# Altium PCB PLL_PCB.PcbDoc (part 1 of 3)
Units mil, origin at the board's own origin, x right, y up, seen from the top; angles counter-clockwise.
Board outline 8251 x 7030 mil, 4 copper layers (Top Layer, Mid-Layer 1, Mid-Layer 2, Bottom Layer); 235 components, 120 nets, 656 pads, 49 vias.
Unrouted connection lines stored in the file: 215.
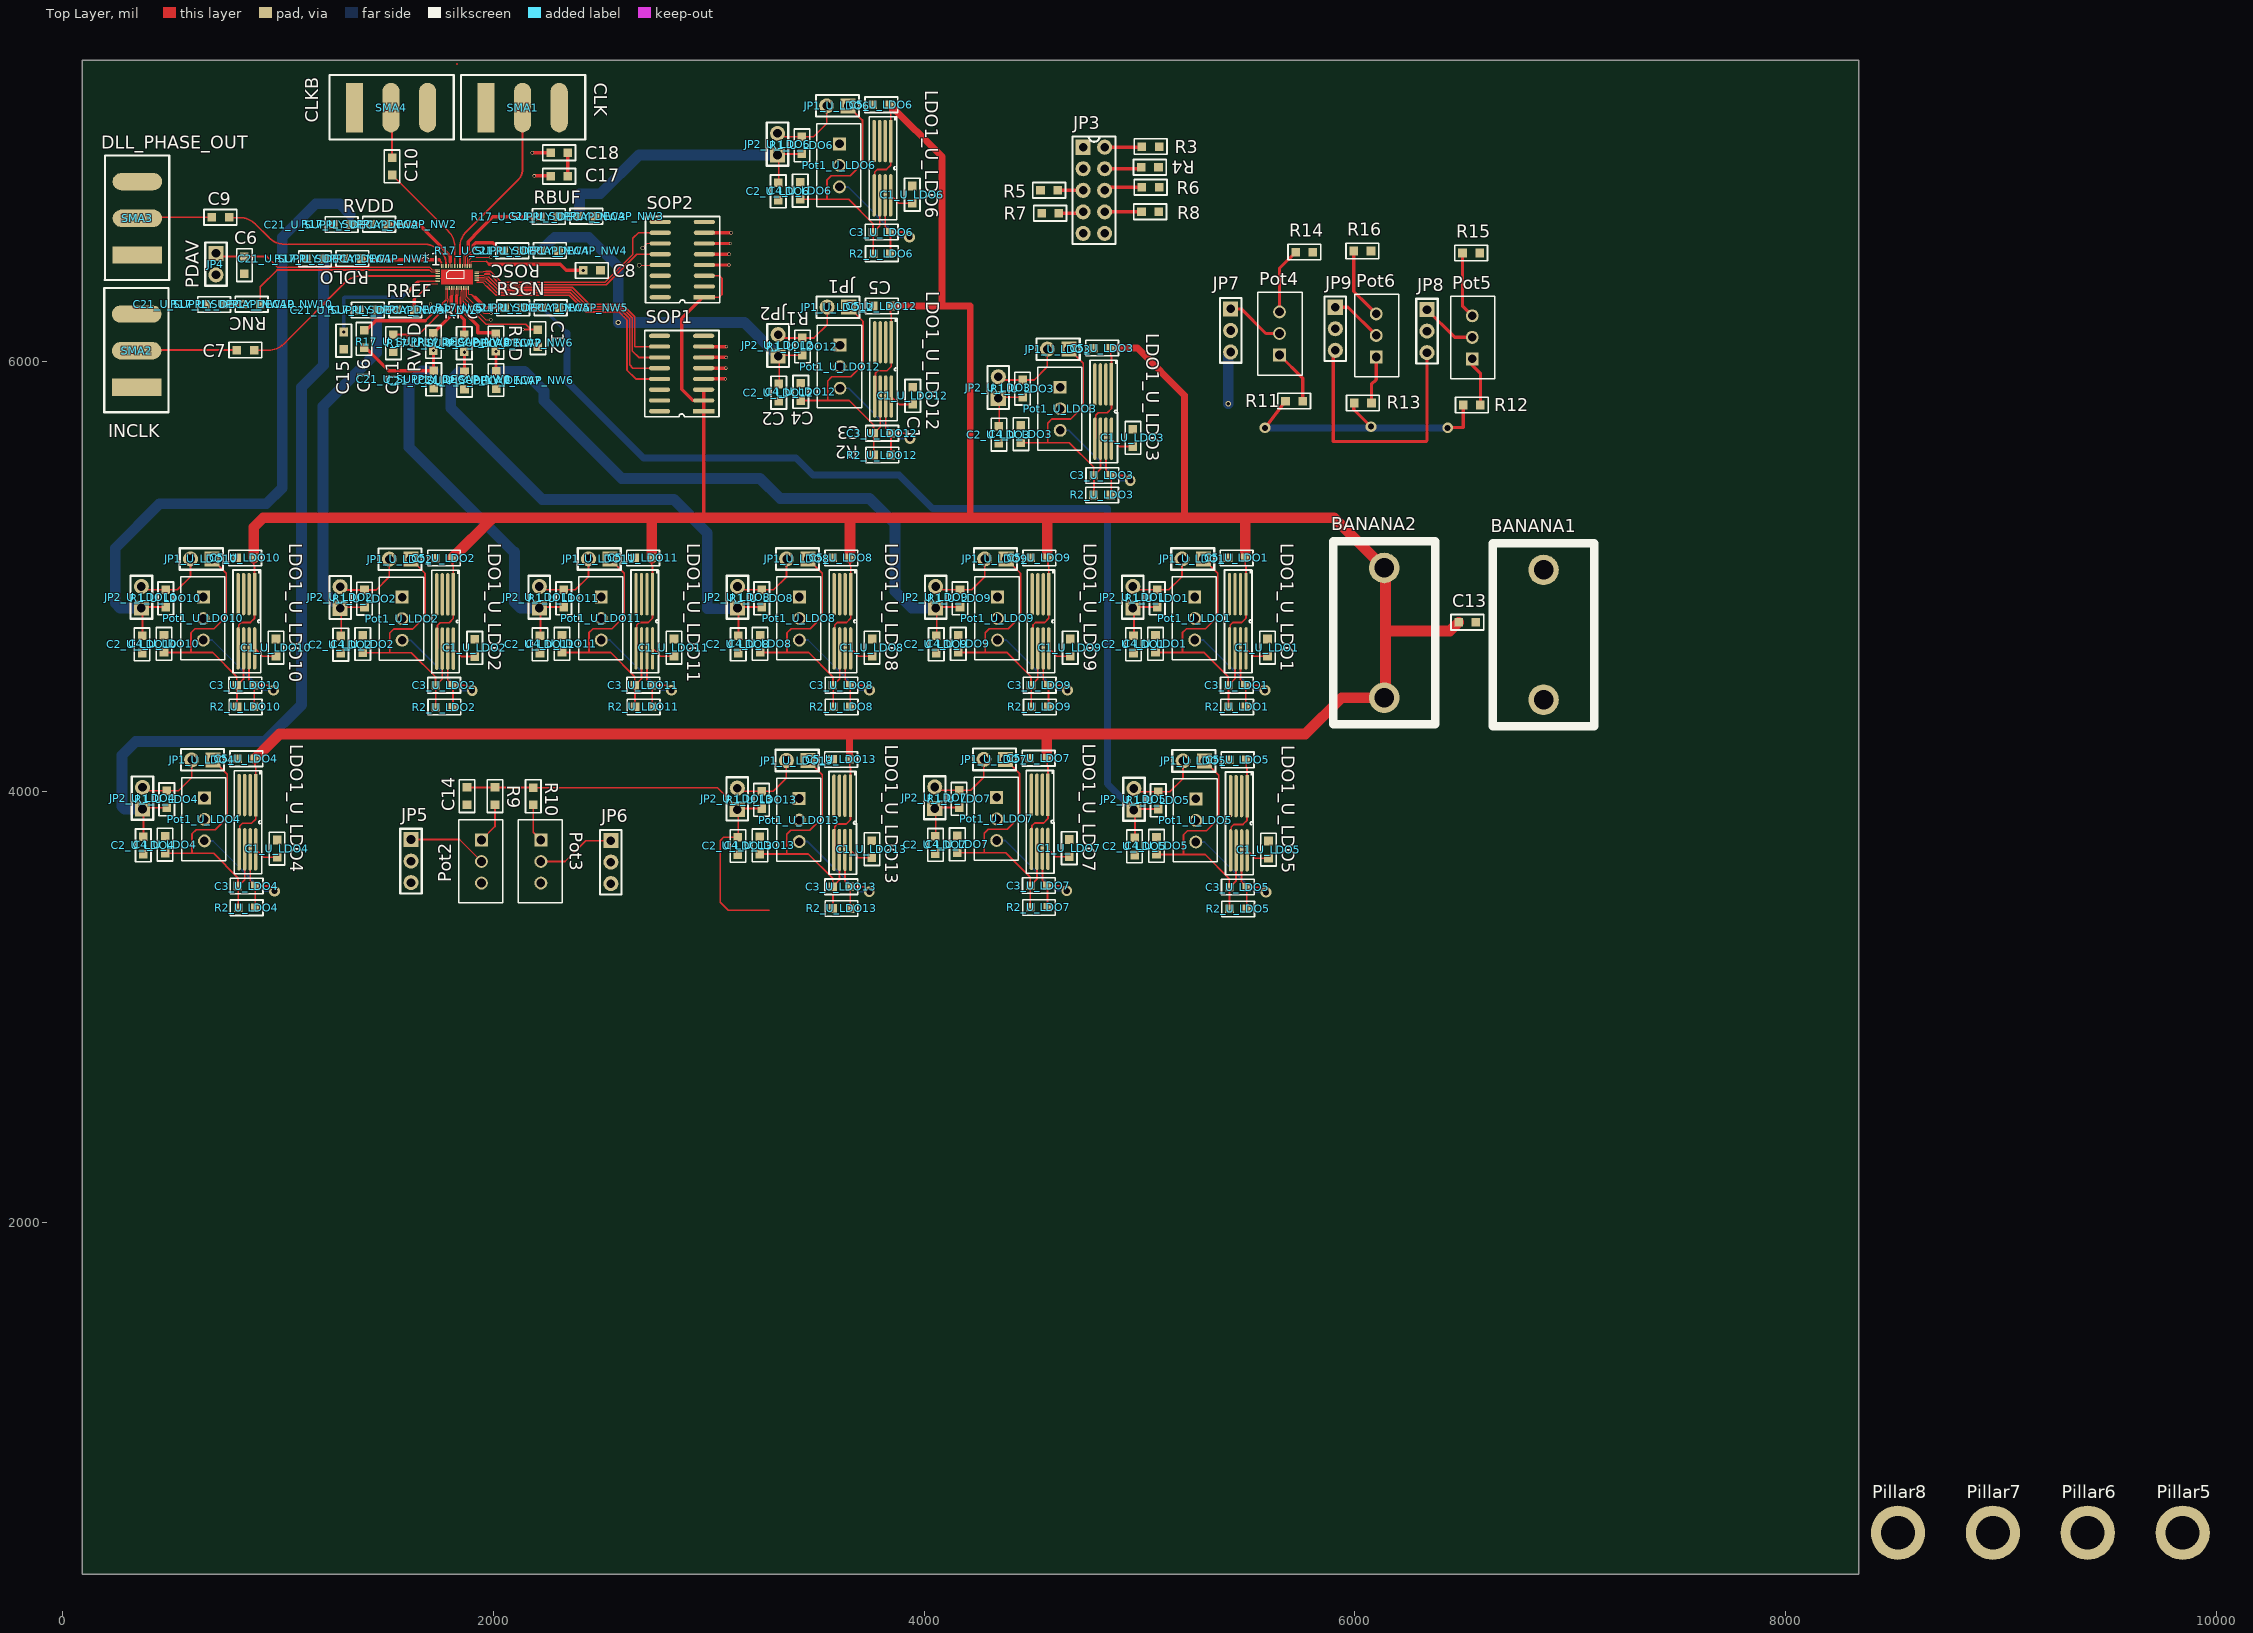
[diagram p0: Top Layer view]
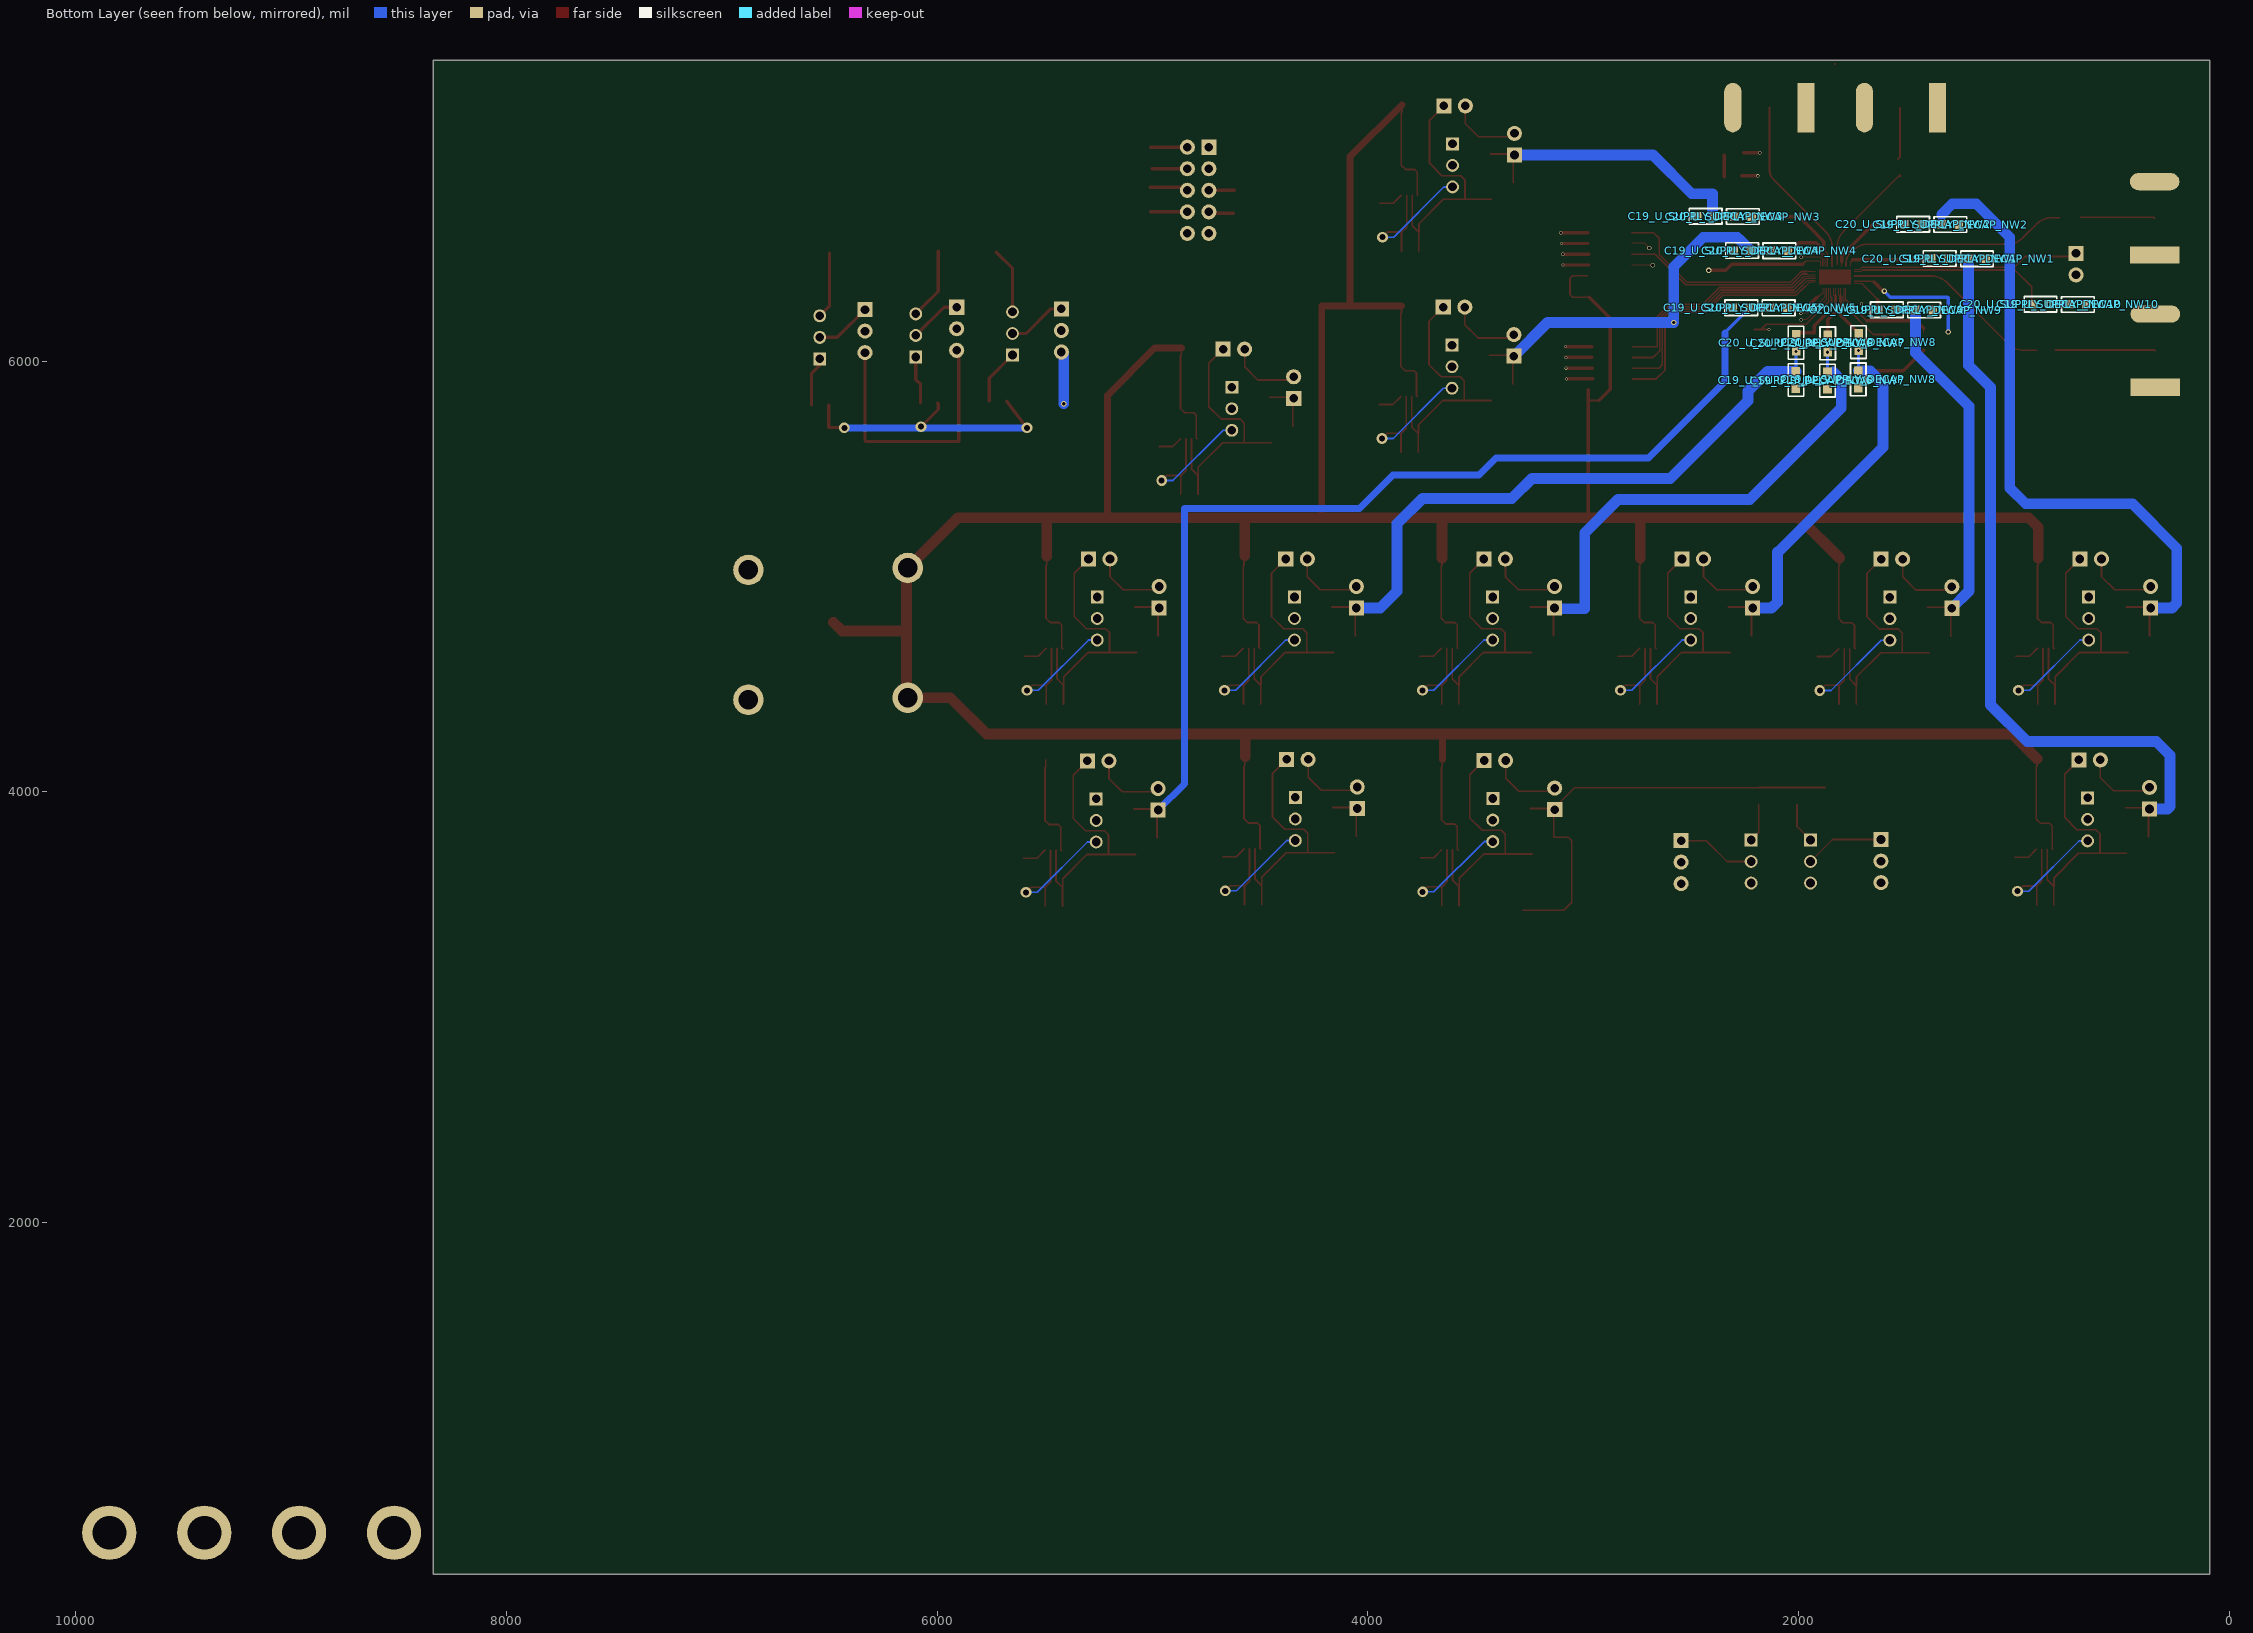
[diagram p1: Bottom Layer view, seen from below]
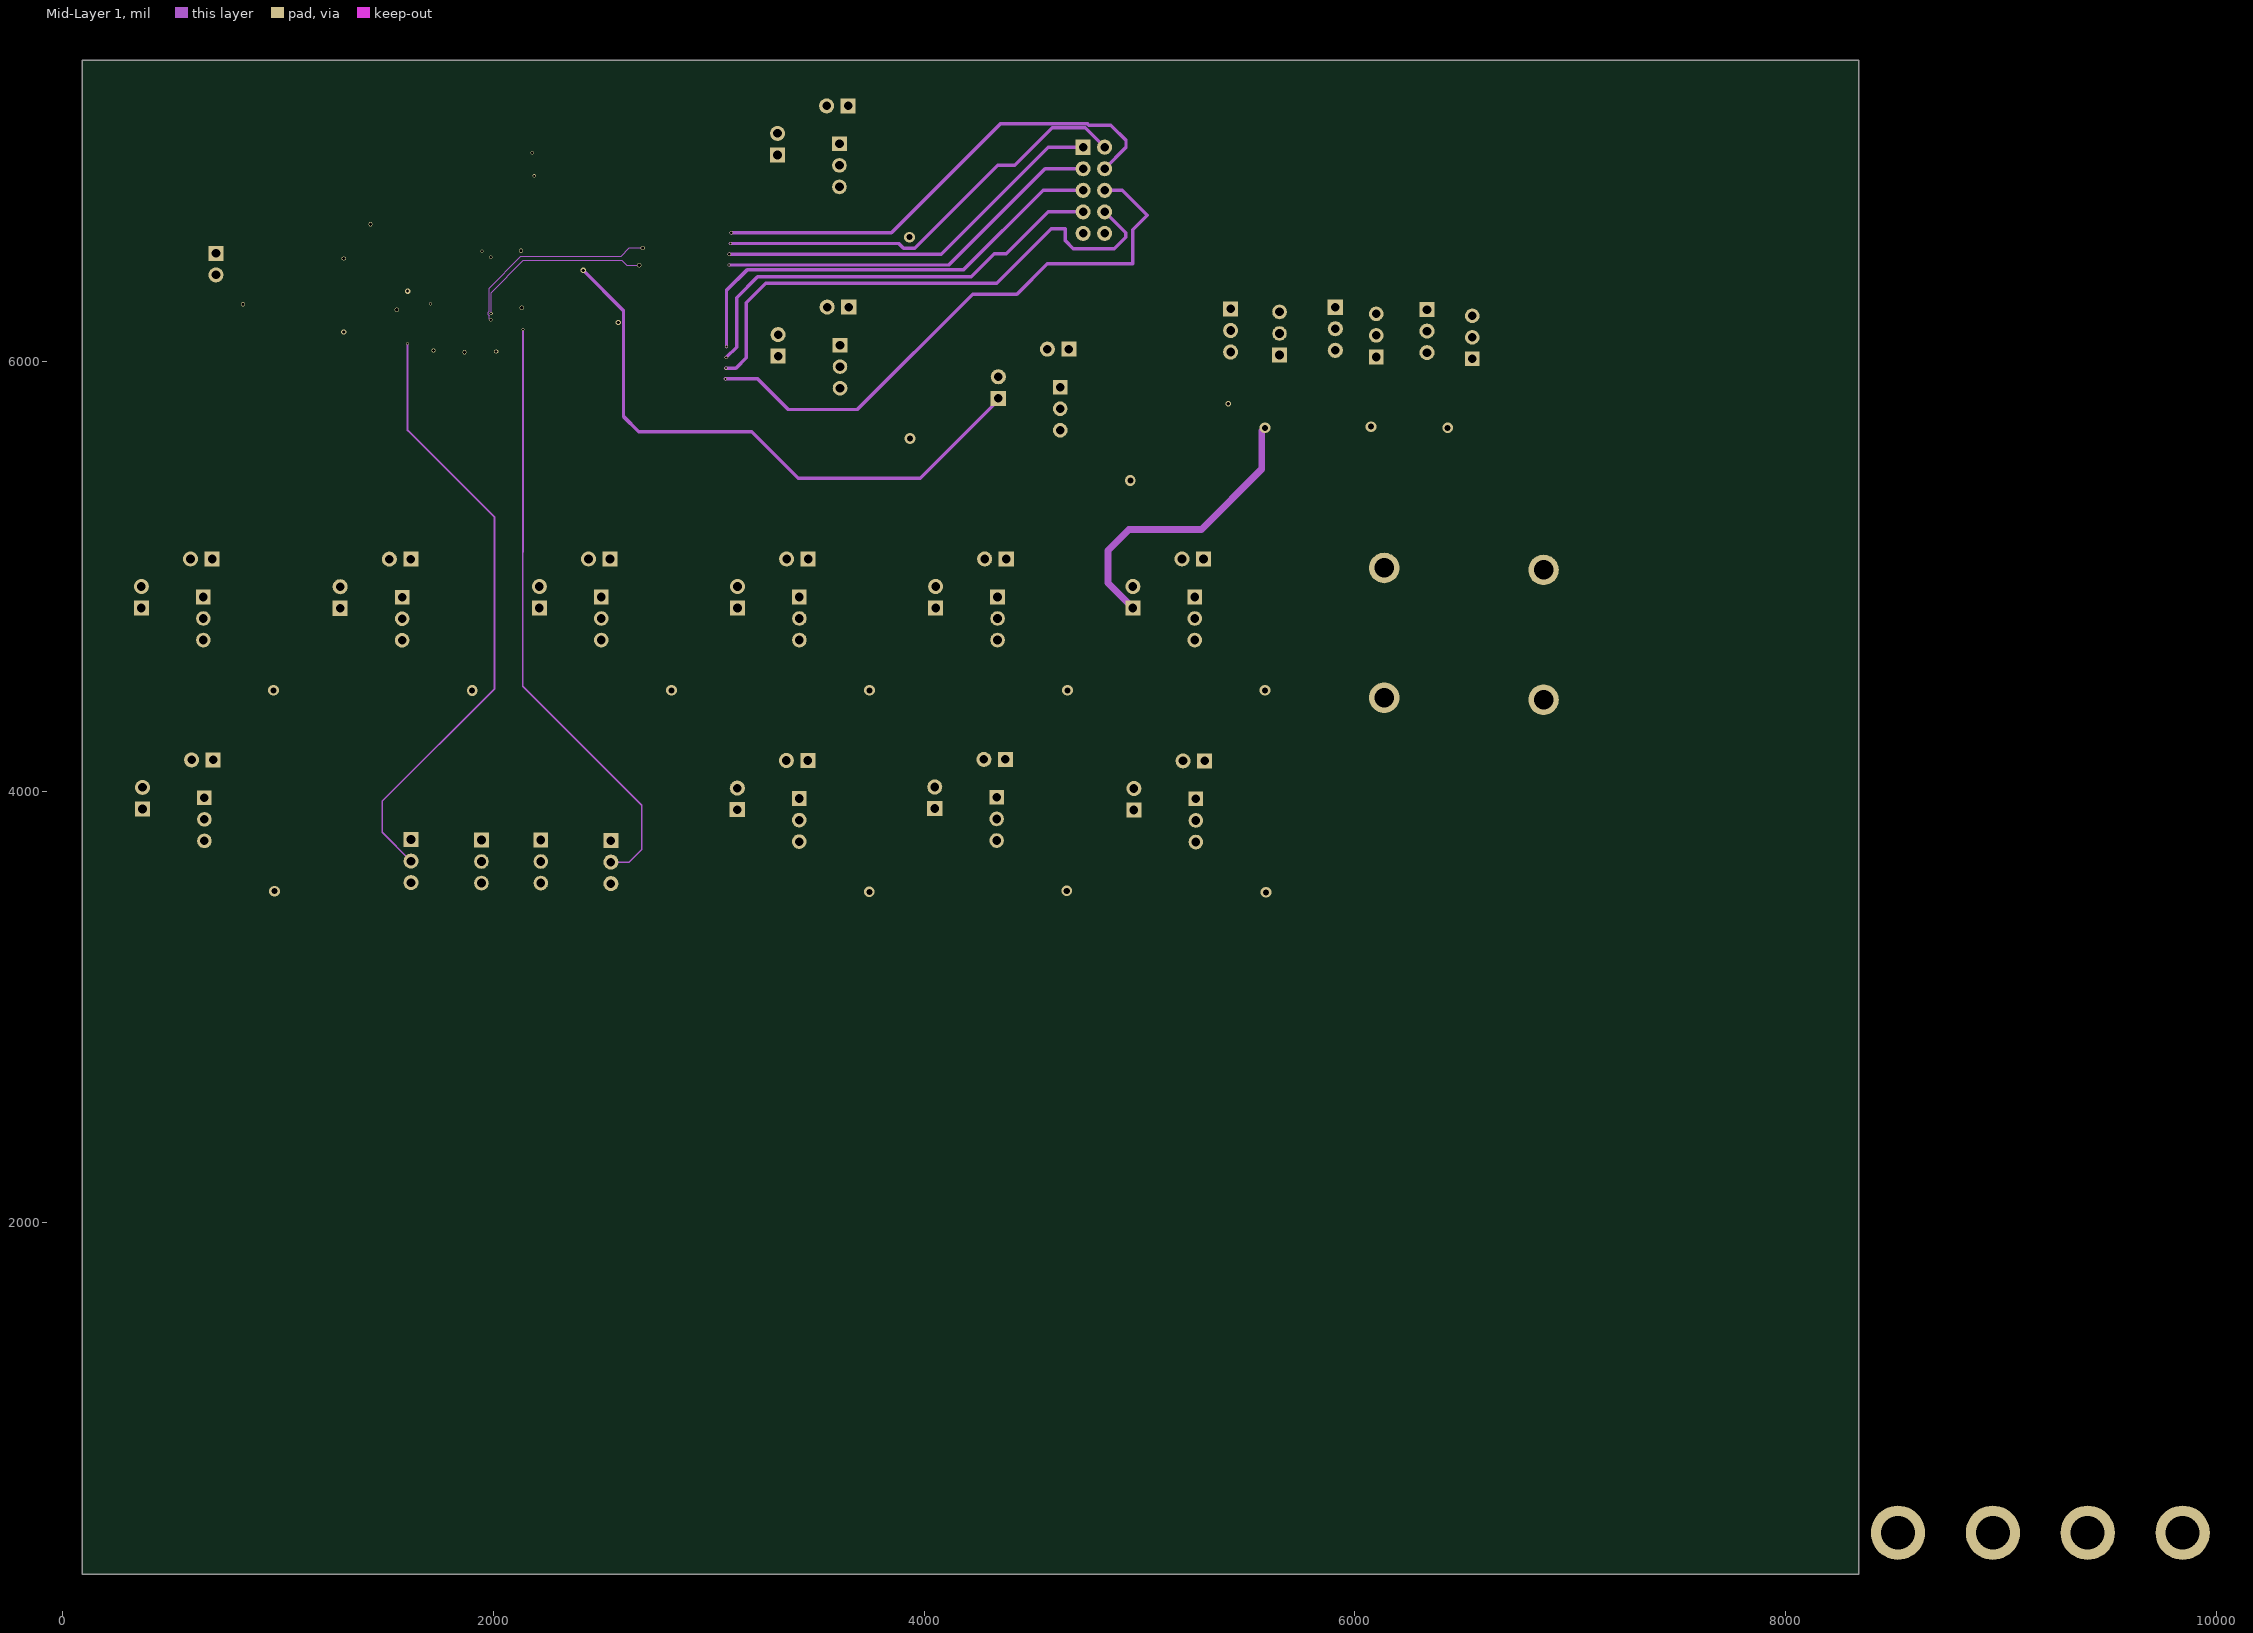
[diagram p2: Mid-Layer 1]
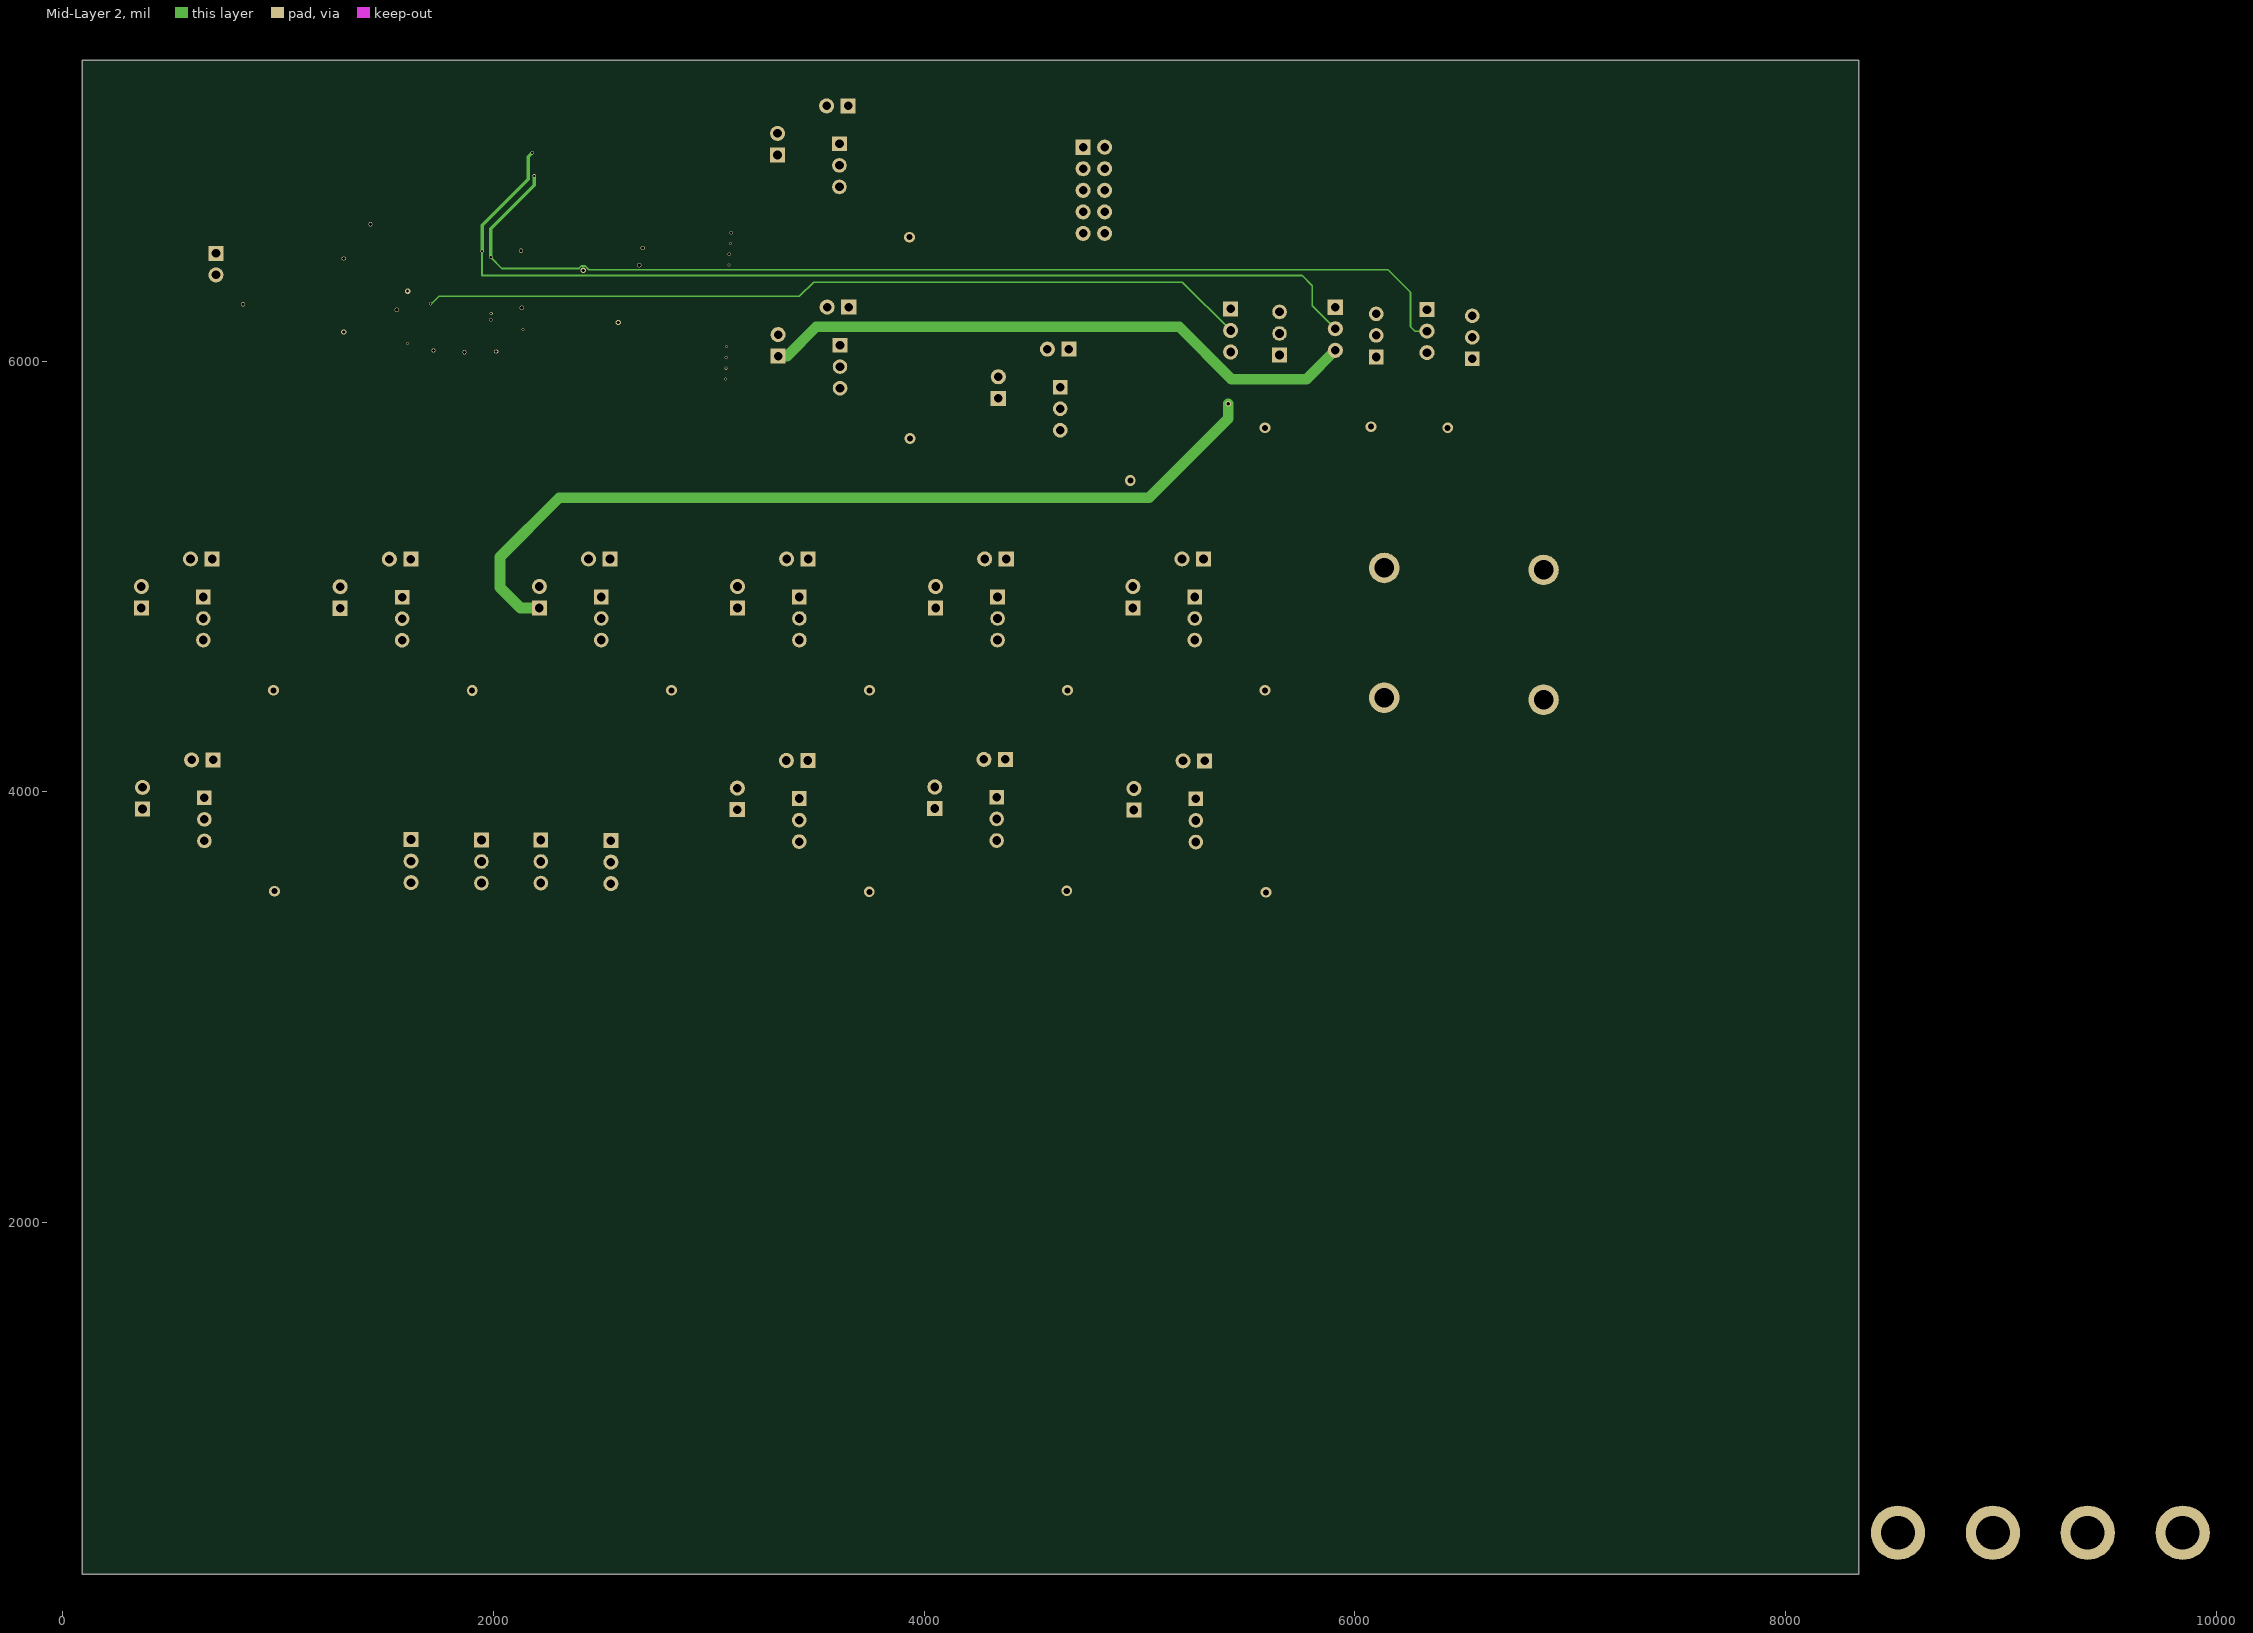
[diagram p3: Mid-Layer 2]

## Layer stack, top to bottom
Top Solder: solder mask 0.4, Solder Resist, Dk 3.5
Top Layer: signal copper 1.4
Dielectric 1: dielectric 12.6, FR-4, Dk 4.8
Mid-Layer 1: signal copper 1.4
Dielectric2: dielectric 12.6, FR-4, Dk 4.8
Mid-Layer 2: signal copper 1.4
Dielectric3: dielectric 12.6, FR-4, Dk 4.8
Bottom Layer: signal copper 1.4
Bottom Solder: solder mask 0.4, Solder Resist, Dk 3.5

## Board outline
90,368 8341,368 8341,7398 90,7398

## Design rules (kind name [scope] priority, off if disabled: settings)
Clearance "Stitching GND" [IsStitchingVia and InNet('GND') vs (IsVia and (Not IsStitchingVia)) Or IsPad] p1: gap=40
Clearance Clearance_CPWG_single [(InNet('INCLK') OR InNet('PLL_CLK_OUT') OR InNet('PLL_CLK_OUTB')) vs InPolygon] p2: gap=6
Clearance [All] p3: gap=4
DiffPairsRouting [InNet('TXP') OR InNet('TXN')] p1: maxlimit=10 minlimit=10 mostfreqgap=10 toplayer_minwidth=15 toplayer_maxwidth=15 toplayer_prefwidth=15 midlayer1_minwidth=15 midlayer1_maxwidth=15 midlayer1_prefwidth=15 midlayer2_minwidth=15 midlayer2_maxwidth=15 midlayer2_prefwidth=15 bottomlayer_minwidth=15 bottomlayer_maxwidth=15 bottomlayer_prefwidth=15 maxuncoupledlength=500
HoleSize [All] p1: absolutevalues=TRUE maxlimit=250 minlimit=10 maxpercent=80.000 minpercent=20.000
MatchedLengths MatchedLengths_1 [InNet('RXP') OR InNet('RXN')] p1: tolerance=10 checknetsindiffpair=FALSE checkdiffpairvsdiffpair=TRUE checkothers=TRUE
MatchedLengths [InNet('TXP') OR InNet('TXN')] p2: tolerance=1 checknetsindiffpair=FALSE checkdiffpairvsdiffpair=TRUE checkothers=TRUE
PolygonConnect PolygonConnect_GND [All] p1: connectstyle=Direct reliefconductorwidth=10 reliefentries=4 polygonreliefangle="90 Angle" airgapwidth=10
PolygonConnect [All] p2: connectstyle=Relief reliefconductorwidth=10 reliefentries=4 polygonreliefangle="90 Angle" airgapwidth=10
RoomDefinition MainSchematic [InComponentClass('MainSchematic')] p1: confinementstyle=ConfineIn formatcopy=TRUE lockcomponents=FALSE outline 8386,424 10109,424 10109,796 8386,796
RoomDefinition U_LDO11 [InComponentClass('U_LDO11')] p2: confinementstyle=ConfineIn formatcopy=TRUE lockcomponents=FALSE outline 2987,5279 2067,5279 2067,4348 2987,4348
RoomDefinition U_SUPPLY_DECAP_NW7 [InComponentClass('U_SUPPLY_DECAP_NW7')] p3: confinementstyle=ConfineIn formatcopy=TRUE lockcomponents=FALSE outline 1927,5820 1927,6170 1796,6170 1796,5820
RoomDefinition U_SUPPLY_DECAP_NW10 [InComponentClass('U_SUPPLY_DECAP_NW10')] p4: confinementstyle=ConfineIn formatcopy=TRUE lockcomponents=FALSE outline 613,6202 963,6202 963,6333 613,6333
RoomDefinition U_SUPPLY_DECAP_NW9 [InComponentClass('U_SUPPLY_DECAP_NW9')] p5: confinementstyle=ConfineIn formatcopy=TRUE lockcomponents=FALSE outline 1327,6176 1677,6176 1677,6307 1327,6307
RoomDefinition U_SUPPLY_DECAP_NW8 [InComponentClass('U_SUPPLY_DECAP_NW8')] p6: confinementstyle=ConfineIn formatcopy=TRUE lockcomponents=FALSE outline 1784,5826 1784,6176 1653,6176 1653,5826
RoomDefinition U_SUPPLY_DECAP_NW6 [InComponentClass('U_SUPPLY_DECAP_NW6')] p7: confinementstyle=ConfineIn formatcopy=TRUE lockcomponents=FALSE outline 2074,5823 2074,6173 1943,6173 1943,5823
RoomDefinition U_SUPPLY_DECAP_NW5 [InComponentClass('U_SUPPLY_DECAP_NW5')] p8: confinementstyle=ConfineIn formatcopy=TRUE lockcomponents=FALSE outline 2355,6311 2005,6311 2005,6180 2355,6180
RoomDefinition U_SUPPLY_DECAP_NW4 [InComponentClass('U_SUPPLY_DECAP_NW4')] p9: confinementstyle=ConfineIn formatcopy=TRUE lockcomponents=FALSE outline 2352,6576 2002,6576 2002,6445 2352,6445
RoomDefinition U_SUPPLY_DECAP_NW3 [InComponentClass('U_SUPPLY_DECAP_NW3')] p10: confinementstyle=ConfineIn formatcopy=TRUE lockcomponents=FALSE outline 2521,6735 2141,6735 2141,6604 2521,6604
RoomDefinition U_SUPPLY_DECAP_NW2 [InComponentClass('U_SUPPLY_DECAP_NW2')] p11: confinementstyle=ConfineIn formatcopy=TRUE lockcomponents=FALSE outline 1205,6573 1555,6573 1555,6704 1205,6704
RoomDefinition U_SUPPLY_DECAP_NW1 [InComponentClass('U_SUPPLY_DECAP_NW1')] p12: confinementstyle=ConfineIn formatcopy=TRUE lockcomponents=FALSE outline 1081,6414 1431,6414 1431,6545 1081,6545
RoomDefinition U_LDO13 [InComponentClass('U_LDO13')] p13: confinementstyle=ConfineIn formatcopy=TRUE lockcomponents=FALSE outline 3906,4343 2986,4343 2986,3412 3906,3412
RoomDefinition U_LDO12 [InComponentClass('U_LDO12')] p14: confinementstyle=ConfineIn formatcopy=TRUE lockcomponents=FALSE outline 4095.5,6448.5 3175.5,6448.5 3175.5,5517.5 4095.5,5517.5
RoomDefinition U_LDO10 [InComponentClass('U_LDO10')] p15: confinementstyle=ConfineIn formatcopy=TRUE lockcomponents=FALSE outline 1139,5279 219,5279 219,4348 1139,4348
RoomDefinition U_LDO9 [InComponentClass('U_LDO9')] p16: confinementstyle=ConfineIn formatcopy=TRUE lockcomponents=FALSE outline 4827,5279 3907,5279 3907,4348 4827,4348
RoomDefinition U_LDO8 [InComponentClass('U_LDO8')] p17: confinementstyle=ConfineIn formatcopy=TRUE lockcomponents=FALSE outline 3907,5279 2987,5279 2987,4348 3907,4348
RoomDefinition U_LDO7 [InComponentClass('U_LDO7')] p18: confinementstyle=ConfineIn formatcopy=TRUE lockcomponents=FALSE outline 4823,4348 3903,4348 3903,3417 4823,3417
RoomDefinition U_LDO6 [InComponentClass('U_LDO6')] p19: confinementstyle=ConfineIn formatcopy=TRUE lockcomponents=FALSE outline 4093,7383 3173,7383 3173,6452 4093,6452
RoomDefinition U_LDO5 [InComponentClass('U_LDO5')] p20: confinementstyle=ConfineIn formatcopy=TRUE lockcomponents=FALSE outline 5748,4341 4828,4341 4828,3410 5748,3410
RoomDefinition U_LDO4 [InComponentClass('U_LDO4')] p21: confinementstyle=ConfineIn formatcopy=TRUE lockcomponents=FALSE outline 1144,4346 224,4346 224,3415 1144,3415
RoomDefinition U_LDO3 [InComponentClass('U_LDO3')] p22: confinementstyle=ConfineIn formatcopy=TRUE lockcomponents=FALSE outline 5118,6253 4198,6253 4198,5322 5118,5322
RoomDefinition U_LDO2 [InComponentClass('U_LDO2')] p23: confinementstyle=ConfineIn formatcopy=TRUE lockcomponents=FALSE outline 2062,5278 1142,5278 1142,4347 2062,4347
RoomDefinition U_LDO1 [InComponentClass('U_LDO1')] p24: confinementstyle=ConfineIn formatcopy=TRUE lockcomponents=FALSE outline 5743,5279 4823,5279 4823,4348 5743,4348
RoutingVias [All] p1: holewidth=28 width=50 viastyle="Through Hole" minholewidth=10 minwidth=15 maxholewidth=250 maxwidth=250
SolderMaskExpansion "Schematic Solder Mask Expansion_2" [InComponent('C6')] p1: expansion=5
SolderMaskExpansion "Schematic Solder Mask Expansion_13" [InComponent('Pot3')] p2: expansion=5
SolderMaskExpansion "Schematic Solder Mask Expansion_10" [InComponent('R10')] p3: expansion=5
SolderMaskExpansion "Schematic Solder Mask Expansion_7" [InComponent('SMA1')] p4: expansion=5
SolderMaskExpansion "Schematic Solder Mask Expansion_4" [InComponent('SMA2')] p5: expansion=5
SolderMaskExpansion "Schematic Solder Mask Expansion_1" [InComponent('SMA3')] p6: expansion=5
SolderMaskExpansion "Schematic Solder Mask Expansion" [InComponent('SMA4')] p7: expansion=5
SolderMaskExpansion "Schematic Solder Mask Expansion_307" [InComponent('C1_U_LDO5')] p8: expansion=5
SolderMaskExpansion "Schematic Solder Mask Expansion_306" [InComponent('C1_U_LDO4')] p9: expansion=5
SolderMaskExpansion "Schematic Solder Mask Expansion_305" [InComponent('C1_U_LDO1')] p10: expansion=5
SolderMaskExpansion "Schematic Solder Mask Expansion_304" [InComponent('C1_U_LDO3')] p11: expansion=5
SolderMaskExpansion "Schematic Solder Mask Expansion_303" [InComponent('C1_U_LDO2')] p12: expansion=5
SolderMaskExpansion "Schematic Solder Mask Expansion_302" [InComponent('BANANA2')] p13: expansion=5
SolderMaskExpansion "Schematic Solder Mask Expansion_301" [InComponent('BANANA1')] p14: expansion=5
SolderMaskExpansion "Schematic Solder Mask Expansion_300" [InComponent('C20_U_SUPPLY_DECAP_NW9')] p15: expansion=5
SolderMaskExpansion "Schematic Solder Mask Expansion_299" [InComponent('C1_U_LDO6')] p16: expansion=5
SolderMaskExpansion "Schematic Solder Mask Expansion_298" [InComponent('C1_U_LDO7')] p17: expansion=5
SolderMaskExpansion "Schematic Solder Mask Expansion_297" [InComponent('C1_U_LDO8')] p18: expansion=5
SolderMaskExpansion "Schematic Solder Mask Expansion_296" [InComponent('C1_U_LDO9')] p19: expansion=5
SolderMaskExpansion "Schematic Solder Mask Expansion_295" [InComponent('C1_U_LDO10')] p20: expansion=5
SolderMaskExpansion "Schematic Solder Mask Expansion_294" [InComponent('C1_U_LDO11')] p21: expansion=5
SolderMaskExpansion "Schematic Solder Mask Expansion_293" [InComponent('C4_U_LDO5')] p22: expansion=5
SolderMaskExpansion "Schematic Solder Mask Expansion_292" [InComponent('C1_U_LDO12')] p23: expansion=5
SolderMaskExpansion "Schematic Solder Mask Expansion_291" [InComponent('C1_U_LDO13')] p24: expansion=5
SolderMaskExpansion "Schematic Solder Mask Expansion_290" [InComponent('C2_U_LDO1')] p25: expansion=5
SolderMaskExpansion "Schematic Solder Mask Expansion_289" [InComponent('C2_U_LDO2')] p26: expansion=5
SolderMaskExpansion "Schematic Solder Mask Expansion_288" [InComponent('C2_U_LDO3')] p27: expansion=5
SolderMaskExpansion "Schematic Solder Mask Expansion_287" [InComponent('C2_U_LDO4')] p28: expansion=5
SolderMaskExpansion "Schematic Solder Mask Expansion_286" [InComponent('C2_U_LDO5')] p29: expansion=5
SolderMaskExpansion "Schematic Solder Mask Expansion_285" [InComponent('C2_U_LDO6')] p30: expansion=5
SolderMaskExpansion "Schematic Solder Mask Expansion_284" [InComponent('C2_U_LDO7')] p31: expansion=5
SolderMaskExpansion "Schematic Solder Mask Expansion_283" [InComponent('C2_U_LDO8')] p32: expansion=5
SolderMaskExpansion "Schematic Solder Mask Expansion_282" [InComponent('C2_U_LDO9')] p33: expansion=5
SolderMaskExpansion "Schematic Solder Mask Expansion_281" [InComponent('C2_U_LDO10')] p34: expansion=5
SolderMaskExpansion "Schematic Solder Mask Expansion_280" [InComponent('C2_U_LDO11')] p35: expansion=5
SolderMaskExpansion "Schematic Solder Mask Expansion_279" [InComponent('C2_U_LDO12')] p36: expansion=5
SolderMaskExpansion "Schematic Solder Mask Expansion_278" [InComponent('C2_U_LDO13')] p37: expansion=5
SolderMaskExpansion "Schematic Solder Mask Expansion_277" [InComponent('C3_U_LDO1')] p38: expansion=5
SolderMaskExpansion "Schematic Solder Mask Expansion_276" [InComponent('C3_U_LDO2')] p39: expansion=5
SolderMaskExpansion "Schematic Solder Mask Expansion_275" [InComponent('C3_U_LDO3')] p40: expansion=5
SolderMaskExpansion "Schematic Solder Mask Expansion_274" [InComponent('C3_U_LDO4')] p41: expansion=5
SolderMaskExpansion "Schematic Solder Mask Expansion_273" [InComponent('C3_U_LDO5')] p42: expansion=5
SolderMaskExpansion "Schematic Solder Mask Expansion_272" [InComponent('C3_U_LDO6')] p43: expansion=5
SolderMaskExpansion "Schematic Solder Mask Expansion_271" [InComponent('C3_U_LDO7')] p44: expansion=5
SolderMaskExpansion "Schematic Solder Mask Expansion_270" [InComponent('C3_U_LDO8')] p45: expansion=5
SolderMaskExpansion "Schematic Solder Mask Expansion_269" [InComponent('C3_U_LDO9')] p46: expansion=5
SolderMaskExpansion "Schematic Solder Mask Expansion_268" [InComponent('C3_U_LDO10')] p47: expansion=5
SolderMaskExpansion "Schematic Solder Mask Expansion_267" [InComponent('C3_U_LDO11')] p48: expansion=5
SolderMaskExpansion "Schematic Solder Mask Expansion_266" [InComponent('C3_U_LDO12')] p49: expansion=5
SolderMaskExpansion "Schematic Solder Mask Expansion_265" [InComponent('C3_U_LDO13')] p50: expansion=5
SolderMaskExpansion "Schematic Solder Mask Expansion_264" [InComponent('C4_U_LDO1')] p51: expansion=5
SolderMaskExpansion "Schematic Solder Mask Expansion_263" [InComponent('C4_U_LDO2')] p52: expansion=5
SolderMaskExpansion "Schematic Solder Mask Expansion_262" [InComponent('C4_U_LDO3')] p53: expansion=5
SolderMaskExpansion "Schematic Solder Mask Expansion_261" [InComponent('C4_U_LDO4')] p54: expansion=5
SolderMaskExpansion "Schematic Solder Mask Expansion_260" [InComponent('C4_U_LDO6')] p55: expansion=5
SolderMaskExpansion "Schematic Solder Mask Expansion_259" [InComponent('C4_U_LDO7')] p56: expansion=5
SolderMaskExpansion "Schematic Solder Mask Expansion_258" [InComponent('C4_U_LDO8')] p57: expansion=5
SolderMaskExpansion "Schematic Solder Mask Expansion_257" [InComponent('C4_U_LDO9')] p58: expansion=5
SolderMaskExpansion "Schematic Solder Mask Expansion_256" [InComponent('C4_U_LDO10')] p59: expansion=5
SolderMaskExpansion "Schematic Solder Mask Expansion_255" [InComponent('C4_U_LDO11')] p60: expansion=5
SolderMaskExpansion "Schematic Solder Mask Expansion_254" [InComponent('C4_U_LDO12')] p61: expansion=5
SolderMaskExpansion "Schematic Solder Mask Expansion_253" [InComponent('C4_U_LDO13')] p62: expansion=5
SolderMaskExpansion "Schematic Solder Mask Expansion_252" [InComponent('C5_U_LDO1')] p63: expansion=5
SolderMaskExpansion "Schematic Solder Mask Expansion_251" [InComponent('C5_U_LDO2')] p64: expansion=5
SolderMaskExpansion "Schematic Solder Mask Expansion_250" [InComponent('C5_U_LDO3')] p65: expansion=5
SolderMaskExpansion "Schematic Solder Mask Expansion_249" [InComponent('C5_U_LDO4')] p66: expansion=5
SolderMaskExpansion "Schematic Solder Mask Expansion_248" [InComponent('C5_U_LDO5')] p67: expansion=5
SolderMaskExpansion "Schematic Solder Mask Expansion_247" [InComponent('C5_U_LDO6')] p68: expansion=5
SolderMaskExpansion "Schematic Solder Mask Expansion_246" [InComponent('C5_U_LDO7')] p69: expansion=5
SolderMaskExpansion "Schematic Solder Mask Expansion_245" [InComponent('C5_U_LDO8')] p70: expansion=5
SolderMaskExpansion "Schematic Solder Mask Expansion_244" [InComponent('C5_U_LDO9')] p71: expansion=5
SolderMaskExpansion "Schematic Solder Mask Expansion_243" [InComponent('C5_U_LDO10')] p72: expansion=5
SolderMaskExpansion "Schematic Solder Mask Expansion_242" [InComponent('C5_U_LDO11')] p73: expansion=5
SolderMaskExpansion "Schematic Solder Mask Expansion_241" [InComponent('C5_U_LDO12')] p74: expansion=5
SolderMaskExpansion "Schematic Solder Mask Expansion_240" [InComponent('C5_U_LDO13')] p75: expansion=5
SolderMaskExpansion "Schematic Solder Mask Expansion_239" [InComponent('C13')] p76: expansion=5
SolderMaskExpansion "Schematic Solder Mask Expansion_238" [InComponent('C14')] p77: expansion=5
SolderMaskExpansion "Schematic Solder Mask Expansion_237" [InComponent('C8')] p78: expansion=5
SolderMaskExpansion "Schematic Solder Mask Expansion_236" [InComponent('C7')] p79: expansion=5
SolderMaskExpansion "Schematic Solder Mask Expansion_235" [InComponent('C11')] p80: expansion=5
SolderMaskExpansion "Schematic Solder Mask Expansion_234" [InComponent('C12')] p81: expansion=5
SolderMaskExpansion "Schematic Solder Mask Expansion_233" [InComponent('C10')] p82: expansion=5
SolderMaskExpansion "Schematic Solder Mask Expansion_232" [InComponent('C15')] p83: expansion=5
SolderMaskExpansion "Schematic Solder Mask Expansion_230" [InComponent('C9')] p84: expansion=5
SolderMaskExpansion "Schematic Solder Mask Expansion_229" [InComponent('C16')] p85: expansion=5
SolderMaskExpansion "Schematic Solder Mask Expansion_228" [InComponent('C17')] p86: expansion=5
SolderMaskExpansion "Schematic Solder Mask Expansion_227" [InComponent('C18')] p87: expansion=5
SolderMaskExpansion "Schematic Solder Mask Expansion_226" [InComponent('C19_U_SUPPLY_DECAP_NW1')] p88: expansion=5
SolderMaskExpansion "Schematic Solder Mask Expansion_225" [InComponent('C19_U_SUPPLY_DECAP_NW2')] p89: expansion=5
SolderMaskExpansion "Schematic Solder Mask Expansion_224" [InComponent('C19_U_SUPPLY_DECAP_NW3')] p90: expansion=5
SolderMaskExpansion "Schematic Solder Mask Expansion_223" [InComponent('C19_U_SUPPLY_DECAP_NW4')] p91: expansion=5
SolderMaskExpansion "Schematic Solder Mask Expansion_222" [InComponent('C19_U_SUPPLY_DECAP_NW5')] p92: expansion=5
SolderMaskExpansion "Schematic Solder Mask Expansion_221" [InComponent('C19_U_SUPPLY_DECAP_NW6')] p93: expansion=5
SolderMaskExpansion "Schematic Solder Mask Expansion_220" [InComponent('C19_U_SUPPLY_DECAP_NW7')] p94: expansion=5
SolderMaskExpansion "Schematic Solder Mask Expansion_219" [InComponent('C19_U_SUPPLY_DECAP_NW8')] p95: expansion=5
SolderMaskExpansion "Schematic Solder Mask Expansion_218" [InComponent('C19_U_SUPPLY_DECAP_NW9')] p96: expansion=5
SolderMaskExpansion "Schematic Solder Mask Expansion_217" [InComponent('C19_U_SUPPLY_DECAP_NW10')] p97: expansion=5
SolderMaskExpansion "Schematic Solder Mask Expansion_216" [InComponent('C20_U_SUPPLY_DECAP_NW1')] p98: expansion=5
SolderMaskExpansion "Schematic Solder Mask Expansion_215" [InComponent('C20_U_SUPPLY_DECAP_NW2')] p99: expansion=5
SolderMaskExpansion "Schematic Solder Mask Expansion_214" [InComponent('C20_U_SUPPLY_DECAP_NW3')] p100: expansion=5
SolderMaskExpansion "Schematic Solder Mask Expansion_213" [InComponent('C20_U_SUPPLY_DECAP_NW4')] p101: expansion=5
SolderMaskExpansion "Schematic Solder Mask Expansion_212" [InComponent('C20_U_SUPPLY_DECAP_NW5')] p102: expansion=5
SolderMaskExpansion "Schematic Solder Mask Expansion_211" [InComponent('C20_U_SUPPLY_DECAP_NW6')] p103: expansion=5
SolderMaskExpansion "Schematic Solder Mask Expansion_210" [InComponent('C20_U_SUPPLY_DECAP_NW7')] p104: expansion=5
SolderMaskExpansion "Schematic Solder Mask Expansion_209" [InComponent('C20_U_SUPPLY_DECAP_NW8')] p105: expansion=5
SolderMaskExpansion "Schematic Solder Mask Expansion_208" [InComponent('C20_U_SUPPLY_DECAP_NW10')] p106: expansion=5
SolderMaskExpansion "Schematic Solder Mask Expansion_207" [InComponent('C21_U_SUPPLY_DECAP_NW1')] p107: expansion=5
SolderMaskExpansion "Schematic Solder Mask Expansion_206" [InComponent('C21_U_SUPPLY_DECAP_NW2')] p108: expansion=5
SolderMaskExpansion "Schematic Solder Mask Expansion_205" [InComponent('C21_U_SUPPLY_DECAP_NW3')] p109: expansion=5
SolderMaskExpansion "Schematic Solder Mask Expansion_204" [InComponent('C21_U_SUPPLY_DECAP_NW4')] p110: expansion=5
SolderMaskExpansion "Schematic Solder Mask Expansion_203" [InComponent('C21_U_SUPPLY_DECAP_NW5')] p111: expansion=5
SolderMaskExpansion "Schematic Solder Mask Expansion_202" [InComponent('C21_U_SUPPLY_DECAP_NW6')] p112: expansion=5
SolderMaskExpansion "Schematic Solder Mask Expansion_201" [InComponent('C21_U_SUPPLY_DECAP_NW7')] p113: expansion=5
SolderMaskExpansion "Schematic Solder Mask Expansion_200" [InComponent('C21_U_SUPPLY_DECAP_NW8')] p114: expansion=5
SolderMaskExpansion "Schematic Solder Mask Expansion_199" [InComponent('C21_U_SUPPLY_DECAP_NW9')] p115: expansion=5
SolderMaskExpansion "Schematic Solder Mask Expansion_198" [InComponent('C21_U_SUPPLY_DECAP_NW10')] p116: expansion=5
SolderMaskExpansion "Schematic Solder Mask Expansion_197" [InComponent('JP1_U_LDO1')] p117: expansion=5
SolderMaskExpansion "Schematic Solder Mask Expansion_196" [InComponent('JP1_U_LDO2')] p118: expansion=5
SolderMaskExpansion "Schematic Solder Mask Expansion_195" [InComponent('JP1_U_LDO3')] p119: expansion=5
SolderMaskExpansion "Schematic Solder Mask Expansion_194" [InComponent('JP1_U_LDO4')] p120: expansion=5
SolderMaskExpansion "Schematic Solder Mask Expansion_193" [InComponent('JP1_U_LDO5')] p121: expansion=5
SolderMaskExpansion "Schematic Solder Mask Expansion_192" [InComponent('JP1_U_LDO6')] p122: expansion=5
SolderMaskExpansion "Schematic Solder Mask Expansion_191" [InComponent('JP1_U_LDO7')] p123: expansion=5
SolderMaskExpansion "Schematic Solder Mask Expansion_190" [InComponent('JP1_U_LDO8')] p124: expansion=5
SolderMaskExpansion "Schematic Solder Mask Expansion_189" [InComponent('JP1_U_LDO9')] p125: expansion=5
SolderMaskExpansion "Schematic Solder Mask Expansion_188" [InComponent('JP1_U_LDO10')] p126: expansion=5
SolderMaskExpansion "Schematic Solder Mask Expansion_187" [InComponent('JP1_U_LDO11')] p127: expansion=5
SolderMaskExpansion "Schematic Solder Mask Expansion_186" [InComponent('JP1_U_LDO12')] p128: expansion=5
SolderMaskExpansion "Schematic Solder Mask Expansion_185" [InComponent('JP1_U_LDO13')] p129: expansion=5
SolderMaskExpansion "Schematic Solder Mask Expansion_184" [InComponent('JP2_U_LDO1')] p130: expansion=5
SolderMaskExpansion "Schematic Solder Mask Expansion_183" [InComponent('JP2_U_LDO2')] p131: expansion=5
SolderMaskExpansion "Schematic Solder Mask Expansion_182" [InComponent('JP2_U_LDO3')] p132: expansion=5
SolderMaskExpansion "Schematic Solder Mask Expansion_181" [InComponent('JP2_U_LDO4')] p133: expansion=5
SolderMaskExpansion "Schematic Solder Mask Expansion_180" [InComponent('JP2_U_LDO5')] p134: expansion=5
SolderMaskExpansion "Schematic Solder Mask Expansion_179" [InComponent('JP2_U_LDO6')] p135: expansion=5
SolderMaskExpansion "Schematic Solder Mask Expansion_178" [InComponent('JP2_U_LDO7')] p136: expansion=5
SolderMaskExpansion "Schematic Solder Mask Expansion_177" [InComponent('JP2_U_LDO8')] p137: expansion=5
SolderMaskExpansion "Schematic Solder Mask Expansion_176" [InComponent('JP2_U_LDO9')] p138: expansion=5
SolderMaskExpansion "Schematic Solder Mask Expansion_175" [InComponent('JP2_U_LDO10')] p139: expansion=5
SolderMaskExpansion "Schematic Solder Mask Expansion_174" [InComponent('JP2_U_LDO11')] p140: expansion=5
SolderMaskExpansion "Schematic Solder Mask Expansion_173" [InComponent('JP2_U_LDO12')] p141: expansion=5
SolderMaskExpansion "Schematic Solder Mask Expansion_172" [InComponent('JP2_U_LDO13')] p142: expansion=5
SolderMaskExpansion "Schematic Solder Mask Expansion_171" [InComponent('JP3')] p143: expansion=5
SolderMaskExpansion "Schematic Solder Mask Expansion_170" [InComponent('JP4')] p144: expansion=5
SolderMaskExpansion "Schematic Solder Mask Expansion_169" [InComponent('JP5')] p145: expansion=5
SolderMaskExpansion "Schematic Solder Mask Expansion_168" [InComponent('JP6')] p146: expansion=5
SolderMaskExpansion "Schematic Solder Mask Expansion_167" [InComponent('JP7')] p147: expansion=5
SolderMaskExpansion "Schematic Solder Mask Expansion_166" [InComponent('JP8')] p148: expansion=5
SolderMaskExpansion "Schematic Solder Mask Expansion_165" [InComponent('JP9')] p149: expansion=5
SolderMaskExpansion "Schematic Solder Mask Expansion_164" [InComponent('LDO1_U_LDO1')] p150: expansion=5
SolderMaskExpansion "Schematic Solder Mask Expansion_163" [InComponent('LDO1_U_LDO2')] p151: expansion=5
SolderMaskExpansion "Schematic Solder Mask Expansion_162" [InComponent('LDO1_U_LDO3')] p152: expansion=5
SolderMaskExpansion "Schematic Solder Mask Expansion_161" [InComponent('LDO1_U_LDO4')] p153: expansion=5
SolderMaskExpansion "Schematic Solder Mask Expansion_160" [InComponent('LDO1_U_LDO5')] p154: expansion=5
SolderMaskExpansion "Schematic Solder Mask Expansion_159" [InComponent('LDO1_U_LDO6')] p155: expansion=5
SolderMaskExpansion "Schematic Solder Mask Expansion_158" [InComponent('LDO1_U_LDO7')] p156: expansion=5
SolderMaskExpansion "Schematic Solder Mask Expansion_157" [InComponent('LDO1_U_LDO8')] p157: expansion=5
SolderMaskExpansion "Schematic Solder Mask Expansion_156" [InComponent('LDO1_U_LDO9')] p158: expansion=5
SolderMaskExpansion "Schematic Solder Mask Expansion_155" [InComponent('LDO1_U_LDO10')] p159: expansion=5
SolderMaskExpansion "Schematic Solder Mask Expansion_154" [InComponent('LDO1_U_LDO11')] p160: expansion=5
SolderMaskExpansion "Schematic Solder Mask Expansion_153" [InComponent('LDO1_U_LDO12')] p161: expansion=5
SolderMaskExpansion "Schematic Solder Mask Expansion_152" [InComponent('LDO1_U_LDO13')] p162: expansion=5
SolderMaskExpansion "Schematic Solder Mask Expansion_151" [InComponent('Pot1_U_LDO1')] p163: expansion=5
SolderMaskExpansion "Schematic Solder Mask Expansion_150" [InComponent('Pot1_U_LDO2')] p164: expansion=5
SolderMaskExpansion "Schematic Solder Mask Expansion_149" [InComponent('Pot1_U_LDO3')] p165: expansion=5
SolderMaskExpansion "Schematic Solder Mask Expansion_148" [InComponent('Pot1_U_LDO4')] p166: expansion=5
SolderMaskExpansion "Schematic Solder Mask Expansion_147" [InComponent('Pot1_U_LDO5')] p167: expansion=5
SolderMaskExpansion "Schematic Solder Mask Expansion_146" [InComponent('Pot1_U_LDO6')] p168: expansion=5
SolderMaskExpansion "Schematic Solder Mask Expansion_145" [InComponent('Pot1_U_LDO7')] p169: expansion=5
SolderMaskExpansion "Schematic Solder Mask Expansion_144" [InComponent('Pot1_U_LDO8')] p170: expansion=5
SolderMaskExpansion "Schematic Solder Mask Expansion_143" [InComponent('Pot1_U_LDO9')] p171: expansion=5
SolderMaskExpansion "Schematic Solder Mask Expansion_142" [InComponent('Pot1_U_LDO10')] p172: expansion=5
SolderMaskExpansion "Schematic Solder Mask Expansion_141" [InComponent('Pot1_U_LDO11')] p173: expansion=5
SolderMaskExpansion "Schematic Solder Mask Expansion_140" [InComponent('Pot1_U_LDO12')] p174: expansion=5
SolderMaskExpansion "Schematic Solder Mask Expansion_139" [InComponent('Pot1_U_LDO13')] p175: expansion=5
SolderMaskExpansion "Schematic Solder Mask Expansion_138" [InComponent('Pot2')] p176: expansion=5
SolderMaskExpansion "Schematic Solder Mask Expansion_136" [InComponent('Pot4')] p177: expansion=5
SolderMaskExpansion "Schematic Solder Mask Expansion_135" [InComponent('Pot5')] p178: expansion=5
SolderMaskExpansion "Schematic Solder Mask Expansion_134" [InComponent('Pot6')] p179: expansion=5
SolderMaskExpansion "Schematic Solder Mask Expansion_133" [InComponent('R1_U_LDO1')] p180: expansion=5
SolderMaskExpansion "Schematic Solder Mask Expansion_132" [InComponent('R1_U_LDO2')] p181: expansion=5
SolderMaskExpansion "Schematic Solder Mask Expansion_131" [InComponent('R1_U_LDO3')] p182: expansion=5
SolderMaskExpansion "Schematic Solder Mask Expansion_130" [InComponent('R1_U_LDO4')] p183: expansion=5
SolderMaskExpansion "Schematic Solder Mask Expansion_125" [InComponent('R1_U_LDO5')] p184: expansion=5
SolderMaskExpansion "Schematic Solder Mask Expansion_120" [InComponent('R1_U_LDO6')] p185: expansion=5
SolderMaskExpansion "Schematic Solder Mask Expansion_115" [InComponent('R1_U_LDO7')] p186: expansion=5
SolderMaskExpansion "Schematic Solder Mask Expansion_110" [InComponent('R1_U_LDO8')] p187: expansion=5
SolderMaskExpansion "Schematic Solder Mask Expansion_105" [InComponent('R1_U_LDO9')] p188: expansion=5
SolderMaskExpansion "Schematic Solder Mask Expansion_103" [InComponent('R1_U_LDO10')] p189: expansion=5
SolderMaskExpansion "Schematic Solder Mask Expansion_100" [InComponent('R1_U_LDO11')] p190: expansion=5
SolderMaskExpansion "Schematic Solder Mask Expansion_97" [InComponent('R1_U_LDO12')] p191: expansion=5
SolderMaskExpansion "Schematic Solder Mask Expansion_94" [InComponent('R1_U_LDO13')] p192: expansion=5
SolderMaskExpansion "Schematic Solder Mask Expansion_91" [InComponent('R2_U_LDO1')] p193: expansion=5
SolderMaskExpansion "Schematic Solder Mask Expansion_88" [InComponent('R2_U_LDO2')] p194: expansion=5
SolderMaskExpansion "Schematic Solder Mask Expansion_87" [InComponent('R2_U_LDO3')] p195: expansion=5
SolderMaskExpansion "Schematic Solder Mask Expansion_86" [InComponent('R2_U_LDO4')] p196: expansion=5
SolderMaskExpansion "Schematic Solder Mask Expansion_85" [InComponent('R2_U_LDO5')] p197: expansion=5
SolderMaskExpansion "Schematic Solder Mask Expansion_84" [InComponent('R2_U_LDO6')] p198: expansion=5
SolderMaskExpansion "Schematic Solder Mask Expansion_79" [InComponent('R2_U_LDO7')] p199: expansion=5
SolderMaskExpansion "Schematic Solder Mask Expansion_74" [InComponent('R2_U_LDO8')] p200: expansion=5
SolderMaskExpansion "Schematic Solder Mask Expansion_71" [InComponent('R2_U_LDO9')] p201: expansion=5
SolderMaskExpansion "Schematic Solder Mask Expansion_68" [InComponent('R2_U_LDO10')] p202: expansion=5
SolderMaskExpansion "Schematic Solder Mask Expansion_65" [InComponent('R2_U_LDO11')] p203: expansion=5
SolderMaskExpansion "Schematic Solder Mask Expansion_62" [InComponent('R2_U_LDO12')] p204: expansion=5
SolderMaskExpansion "Schematic Solder Mask Expansion_57" [InComponent('R2_U_LDO13')] p205: expansion=5
SolderMaskExpansion "Schematic Solder Mask Expansion_54" [InComponent('R3')] p206: expansion=5
SolderMaskExpansion "Schematic Solder Mask Expansion_49" [InComponent('R4')] p207: expansion=5
SolderMaskExpansion "Schematic Solder Mask Expansion_46" [InComponent('R5')] p208: expansion=5
SolderMaskExpansion "Schematic Solder Mask Expansion_45" [InComponent('R6')] p209: expansion=5
SolderMaskExpansion "Schematic Solder Mask Expansion_44" [InComponent('R7')] p210: expansion=5
SolderMaskExpansion "Schematic Solder Mask Expansion_43" [InComponent('R8')] p211: expansion=5
SolderMaskExpansion "Schematic Solder Mask Expansion_42" [InComponent('R9')] p212: expansion=5
SolderMaskExpansion "Schematic Solder Mask Expansion_40" [InComponent('R11')] p213: expansion=5
SolderMaskExpansion "Schematic Solder Mask Expansion_39" [InComponent('R12')] p214: expansion=5
SolderMaskExpansion "Schematic Solder Mask Expansion_38" [InComponent('R13')] p215: expansion=5
SolderMaskExpansion "Schematic Solder Mask Expansion_37" [InComponent('R14')] p216: expansion=5
SolderMaskExpansion "Schematic Solder Mask Expansion_36" [InComponent('R15')] p217: expansion=5
SolderMaskExpansion "Schematic Solder Mask Expansion_35" [InComponent('R16')] p218: expansion=5
SolderMaskExpansion "Schematic Solder Mask Expansion_34" [InComponent('R17_U_SUPPLY_DECAP_NW1')] p219: expansion=5
SolderMaskExpansion "Schematic Solder Mask Expansion_33" [InComponent('R17_U_SUPPLY_DECAP_NW2')] p220: expansion=5
SolderMaskExpansion "Schematic Solder Mask Expansion_32" [InComponent('R17_U_SUPPLY_DECAP_NW3')] p221: expansion=5
SolderMaskExpansion "Schematic Solder Mask Expansion_31" [InComponent('R17_U_SUPPLY_DECAP_NW4')] p222: expansion=5
SolderMaskExpansion "Schematic Solder Mask Expansion_30" [InComponent('R17_U_SUPPLY_DECAP_NW5')] p223: expansion=5
SolderMaskExpansion "Schematic Solder Mask Expansion_25" [InComponent('R17_U_SUPPLY_DECAP_NW6')] p224: expansion=5
SolderMaskExpansion "Schematic Solder Mask Expansion_20" [InComponent('R17_U_SUPPLY_DECAP_NW7')] p225: expansion=5
SolderMaskExpansion "Schematic Solder Mask Expansion_15" [InComponent('R17_U_SUPPLY_DECAP_NW8')] p226: expansion=5
SolderMaskExpansion "Schematic Solder Mask Expansion_12" [InComponent('R17_U_SUPPLY_DECAP_NW9')] p227: expansion=5
SolderMaskExpansion "Schematic Solder Mask Expansion_9" [InComponent('R17_U_SUPPLY_DECAP_NW10')] p228: expansion=5
SolderMaskExpansion "Schematic Solder Mask Expansion_6" [InComponent('SOP1')] p229: expansion=5
SolderMaskExpansion "Schematic Solder Mask Expansion_3" [InComponent('SOP2')] p230: expansion=5
SolderMaskExpansion [All] p231: expansion=5
UnpouredPolygon [All] p1: allowunpoured=FALSE
Width Width_HS_Signal [InNet('INCLK') OR InNet('PLL_CLK_OUT') OR InNet('PLL_CLK_OUTB')] p1: maxlimit=8 minlimit=8 preferedwidth=8
Width [All] p2: maxlimit=60 minlimit=4 preferedwidth=30
27 further rules are at their usual default settings.

## Classes and differential pairs
channel class SUPPLY_DECAP_NW: U_SUPPLY_DECAP_NW1 U_SUPPLY_DECAP_NW2 U_SUPPLY_DECAP_NW3 U_SUPPLY_DECAP_NW4 U_SUPPLY_DECAP_NW5 U_SUPPLY_DECAP_NW6 U_SUPPLY_DECAP_NW7 U_SUPPLY_DECAP_NW8 U_SUPPLY_DECAP_NW9 U_SUPPLY_DECAP_NW10
component class U_SUPPLY_DECAP_NW10: C19_U_SUPPLY_DECAP_NW10 C20_U_SUPPLY_DECAP_NW10 C21_U_SUPPLY_DECAP_NW10 R17_U_SUPPLY_DECAP_NW10
component class U_SUPPLY_DECAP_NW9: C19_U_SUPPLY_DECAP_NW9 C20_U_SUPPLY_DECAP_NW9 C21_U_SUPPLY_DECAP_NW9 R17_U_SUPPLY_DECAP_NW9
component class U_SUPPLY_DECAP_NW8: C19_U_SUPPLY_DECAP_NW8 C20_U_SUPPLY_DECAP_NW8 C21_U_SUPPLY_DECAP_NW8 R17_U_SUPPLY_DECAP_NW8
component class U_SUPPLY_DECAP_NW7: C19_U_SUPPLY_DECAP_NW7 C20_U_SUPPLY_DECAP_NW7 C21_U_SUPPLY_DECAP_NW7 R17_U_SUPPLY_DECAP_NW7
component class U_SUPPLY_DECAP_NW6: C19_U_SUPPLY_DECAP_NW6 C20_U_SUPPLY_DECAP_NW6 C21_U_SUPPLY_DECAP_NW6 R17_U_SUPPLY_DECAP_NW6
component class U_SUPPLY_DECAP_NW5: C19_U_SUPPLY_DECAP_NW5 C20_U_SUPPLY_DECAP_NW5 C21_U_SUPPLY_DECAP_NW5 R17_U_SUPPLY_DECAP_NW5
component class U_SUPPLY_DECAP_NW4: C19_U_SUPPLY_DECAP_NW4 C20_U_SUPPLY_DECAP_NW4 C21_U_SUPPLY_DECAP_NW4 R17_U_SUPPLY_DECAP_NW4
component class U_SUPPLY_DECAP_NW3: C19_U_SUPPLY_DECAP_NW3 C20_U_SUPPLY_DECAP_NW3 C21_U_SUPPLY_DECAP_NW3 R17_U_SUPPLY_DECAP_NW3
component class U_SUPPLY_DECAP_NW2: C19_U_SUPPLY_DECAP_NW2 C20_U_SUPPLY_DECAP_NW2 C21_U_SUPPLY_DECAP_NW2 R17_U_SUPPLY_DECAP_NW2
component class U_SUPPLY_DECAP_NW1: C19_U_SUPPLY_DECAP_NW1 C20_U_SUPPLY_DECAP_NW1 C21_U_SUPPLY_DECAP_NW1 R17_U_SUPPLY_DECAP_NW1
component class MainSchematic: *1 BANANA1 BANANA2 C6 C7 C8 C9 C10 C11 C12 C13 C14 C15 C16 C17 C18 EndLaunch_SW3 JP3 JP4 JP5 JP6 JP7 JP8 JP9 Pillar5 Pillar6 Pillar7 Pillar8 Pot2 Pot3 Pot4 Pot5 Pot6 R3 R4 R5 R6 R7 R8 R9 R10 R11 R12 R13 R14 R15 R16 SMA1 SMA2 SMA3 SMA4 SOP1 SOP2
component class U_LDO1: C1_U_LDO1 C2_U_LDO1 C3_U_LDO1 C4_U_LDO1 C5_U_LDO1 JP1_U_LDO1 JP2_U_LDO1 LDO1_U_LDO1 Pot1_U_LDO1 R1_U_LDO1 R2_U_LDO1
component class U_LDO2: C1_U_LDO2 C2_U_LDO2 C3_U_LDO2 C4_U_LDO2 C5_U_LDO2 JP1_U_LDO2 JP2_U_LDO2 LDO1_U_LDO2 Pot1_U_LDO2 R1_U_LDO2 R2_U_LDO2
component class U_LDO3: C1_U_LDO3 C2_U_LDO3 C3_U_LDO3 C4_U_LDO3 C5_U_LDO3 JP1_U_LDO3 JP2_U_LDO3 LDO1_U_LDO3 Pot1_U_LDO3 R1_U_LDO3 R2_U_LDO3
component class U_LDO4: C1_U_LDO4 C2_U_LDO4 C3_U_LDO4 C4_U_LDO4 C5_U_LDO4 JP1_U_LDO4 JP2_U_LDO4 LDO1_U_LDO4 Pot1_U_LDO4 R1_U_LDO4 R2_U_LDO4
component class U_LDO5: C1_U_LDO5 C2_U_LDO5 C3_U_LDO5 C4_U_LDO5 C5_U_LDO5 JP1_U_LDO5 JP2_U_LDO5 LDO1_U_LDO5 Pot1_U_LDO5 R1_U_LDO5 R2_U_LDO5
component class U_LDO6: C1_U_LDO6 C2_U_LDO6 C3_U_LDO6 C4_U_LDO6 C5_U_LDO6 JP1_U_LDO6 JP2_U_LDO6 LDO1_U_LDO6 Pot1_U_LDO6 R1_U_LDO6 R2_U_LDO6
component class U_LDO7: C1_U_LDO7 C2_U_LDO7 C3_U_LDO7 C4_U_LDO7 C5_U_LDO7 JP1_U_LDO7 JP2_U_LDO7 LDO1_U_LDO7 Pot1_U_LDO7 R1_U_LDO7 R2_U_LDO7
component class U_LDO8: C1_U_LDO8 C2_U_LDO8 C3_U_LDO8 C4_U_LDO8 C5_U_LDO8 JP1_U_LDO8 JP2_U_LDO8 LDO1_U_LDO8 Pot1_U_LDO8 R1_U_LDO8 R2_U_LDO8
component class U_LDO9: C1_U_LDO9 C2_U_LDO9 C3_U_LDO9 C4_U_LDO9 C5_U_LDO9 JP1_U_LDO9 JP2_U_LDO9 LDO1_U_LDO9 Pot1_U_LDO9 R1_U_LDO9 R2_U_LDO9
component class U_LDO10: C1_U_LDO10 C2_U_LDO10 C3_U_LDO10 C4_U_LDO10 C5_U_LDO10 JP1_U_LDO10 JP2_U_LDO10 LDO1_U_LDO10 Pot1_U_LDO10 R1_U_LDO10 R2_U_LDO10
component class U_LDO11: C1_U_LDO11 C2_U_LDO11 C3_U_LDO11 C4_U_LDO11 C5_U_LDO11 JP1_U_LDO11 JP2_U_LDO11 LDO1_U_LDO11 Pot1_U_LDO11 R1_U_LDO11 R2_U_LDO11
component class U_LDO12: C1_U_LDO12 C2_U_LDO12 C3_U_LDO12 C4_U_LDO12 C5_U_LDO12 JP1_U_LDO12 JP2_U_LDO12 LDO1_U_LDO12 Pot1_U_LDO12 R1_U_LDO12 R2_U_LDO12
component class U_LDO13: C1_U_LDO13 C2_U_LDO13 C3_U_LDO13 C4_U_LDO13 C5_U_LDO13 JP1_U_LDO13 JP2_U_LDO13 LDO1_U_LDO13 Pot1_U_LDO13 R1_U_LDO13 R2_U_LDO13
channel class LDO: U_LDO1 U_LDO2 U_LDO3 U_LDO4 U_LDO5 U_LDO6 U_LDO7 U_LDO8 U_LDO9 U_LDO10 U_LDO11 U_LDO12 U_LDO13

## Components (designator, comment, footprint, x,y, rotation, side; value= is the part's Value field where it differs from the comment)
*1 "Component_1" PCBComponent_1 1720,6321 r0 top
BANANA1 "BANANA_CONN" BANANA_CONN 6876,5031 r270 top
BANANA2 "BANANA_CONN" BANANA_CONN 6136,5040 r270 top
C1_U_LDO1 "10nF" Capacitor 5594,4670 r90 top (schematic designator C1)
C1_U_LDO2 "10nF" Capacitor 1913,4669 r90 top (schematic designator C1)
C1_U_LDO3 "10nF" Capacitor 4969,5644 r90 top (schematic designator C1)
C1_U_LDO4 "10nF" Capacitor 995,3737 r90 top (schematic designator C1)
C1_U_LDO5 "10nF" Capacitor 5599,3732 r90 top (schematic designator C1)
C1_U_LDO6 "10nF" Capacitor 3944,6774 r90 top (schematic designator C1)
C1_U_LDO7 "10nF" Capacitor 4674,3739 r90 top (schematic designator C1)
C1_U_LDO8 "10nF" Capacitor 3758,4670 r90 top (schematic designator C1)
C1_U_LDO9 "10nF" Capacitor 4678,4670 r90 top (schematic designator C1)
C1_U_LDO10 "10nF" Capacitor 990,4670 r90 top (schematic designator C1)
C1_U_LDO11 "10nF" Capacitor 2838,4670 r90 top (schematic designator C1)
C1_U_LDO12 "10nF" Capacitor 3946.5,5839.5 r90 top (schematic designator C1)
C1_U_LDO13 "10nF" Capacitor 3757,3734 r90 top (schematic designator C1)
C2_U_LDO1 "10uF" Capacitor 4972,4685 r270 top (schematic designator C2)
C2_U_LDO2 "10uF" Capacitor 1291,4684 r270 top (schematic designator C2)
C2_U_LDO3 "10uF" Capacitor 4347,5659 r270 top (schematic designator C2)
C2_U_LDO4 "10uF" Capacitor 373,3752 r270 top (schematic designator C2)
C2_U_LDO5 "10uF" Capacitor 4977,3747 r270 top (schematic designator C2)
C2_U_LDO6 "10uF" Capacitor 3322,6789 r270 top (schematic designator C2)
C2_U_LDO7 "10uF" Capacitor 4052,3754 r270 top (schematic designator C2)
C2_U_LDO8 "10uF" Capacitor 3136,4685 r270 top (schematic designator C2)
C2_U_LDO9 "10uF" Capacitor 4056,4685 r270 top (schematic designator C2)
C2_U_LDO10 "10uF" Capacitor 368,4685 r270 top (schematic designator C2)
C2_U_LDO11 "10uF" Capacitor 2216,4685 r270 top (schematic designator C2)
C2_U_LDO12 "10uF" Capacitor 3324.5,5854.5 r270 top (schematic designator C2)
C2_U_LDO13 "10uF" Capacitor 3135,3749 r270 top (schematic designator C2)
C3_U_LDO1 "10nF" Capacitor 5452,4496 r0 top (schematic designator C3)
C3_U_LDO2 "10nF" Capacitor 1771,4495 r0 top (schematic designator C3)
C3_U_LDO3 "10nF" Capacitor 4827,5470 r0 top (schematic designator C3)
C3_U_LDO4 "10nF" Capacitor 853,3563 r0 top (schematic designator C3)
C3_U_LDO5 "10nF" Capacitor 5457,3558 r0 top (schematic designator C3)
C3_U_LDO6 "10nF" Capacitor 3802,6600 r0 top (schematic designator C3)
C3_U_LDO7 "10nF" Capacitor 4532,3565 r0 top (schematic designator C3)
C3_U_LDO8 "10nF" Capacitor 3616,4496 r0 top (schematic designator C3)
C3_U_LDO9 "10nF" Capacitor 4536,4496 r0 top (schematic designator C3)
C3_U_LDO10 "10nF" Capacitor 848,4496 r0 top (schematic designator C3)
C3_U_LDO11 "10nF" Capacitor 2696,4496 r0 top (schematic designator C3)
C3_U_LDO12 "10nF" Capacitor 3804.5,5665.5 r0 top (schematic designator C3)
C3_U_LDO13 "10nF" Capacitor 3615,3560 r0 top (schematic designator C3)
C4_U_LDO1 "10uF" Capacitor 5074,4688 r90 top (schematic designator C4)
C4_U_LDO2 "10uF" Capacitor 1393,4687 r90 top (schematic designator C4)
C4_U_LDO3 "10uF" Capacitor 4449,5662 r90 top (schematic designator C4)
C4_U_LDO4 "10uF" Capacitor 475,3755 r90 top (schematic designator C4)
C4_U_LDO5 "10uF" Capacitor 5079,3750 r90 top (schematic designator C4)
C4_U_LDO6 "10uF" Capacitor 3424,6792 r90 top (schematic designator C4)
C4_U_LDO7 "10uF" Capacitor 4154,3757 r90 top (schematic designator C4)
C4_U_LDO8 "10uF" Capacitor 3238,4688 r90 top (schematic designator C4)
C4_U_LDO9 "10uF" Capacitor 4158,4688 r90 top (schematic designator C4)
C4_U_LDO10 "10uF" Capacitor 470,4688 r90 top (schematic designator C4)
C4_U_LDO11 "10uF" Capacitor 2318,4688 r90 top (schematic designator C4)
C4_U_LDO12 "10uF" Capacitor 3426.5,5857.5 r90 top (schematic designator C4)
C4_U_LDO13 "10uF" Capacitor 3237,3752 r90 top (schematic designator C4)
C5_U_LDO1 "10uF" Capacitor 5451,5087 r0 top (schematic designator C5)
C5_U_LDO2 "10uF" Capacitor 1770,5086 r0 top (schematic designator C5)
C5_U_LDO3 "10uF" Capacitor 4826,6061 r0 top (schematic designator C5)
C5_U_LDO4 "10uF" Capacitor 852,4154 r0 top (schematic designator C5)
C5_U_LDO5 "10uF" Capacitor 5456,4149 r0 top (schematic designator C5)
C5_U_LDO6 "10uF" Capacitor 3801,7191 r0 top (schematic designator C5)
C5_U_LDO7 "10uF" Capacitor 4531,4156 r0 top (schematic designator C5)
C5_U_LDO8 "10uF" Capacitor 3615,5087 r0 top (schematic designator C5)
C5_U_LDO9 "10uF" Capacitor 4535,5087 r0 top (schematic designator C5)
C5_U_LDO10 "10uF" Capacitor 847,5087 r0 top (schematic designator C5)
C5_U_LDO11 "10uF" Capacitor 2695,5087 r0 top (schematic designator C5)
C5_U_LDO12 "10uF" Capacitor 3803.5,6256.5 r0 top (schematic designator C5)
C5_U_LDO13 "10uF" Capacitor 3614,4151 r0 top (schematic designator C5)
C6 "cap" Capacitor 843,6446 r90 top
C7 "cap" Capacitor 848,6052 r0 top
C8 "cap" Capacitor 2457,6422 r0 top
C9 "cap" Capacitor 732,6669 r0 top
C10 "cap" Capacitor 1529,6905 r270 top
C11 "10uF" Capacitor 1535,6084 r90 top
C12 "10uF" Capacitor 2206,6107 r90 top
C13 "10uF" Capacitor 6522,4788 r180 top
C14 "10uF" Capacitor 1877,3981 r90 top
C15 "cap" Capacitor 1305,6096 r90 top
C16 "1uF" Capacitor 1399,6104 r90 top
C17 "1uF" Capacitor 2305,6859 r180 top
C18 "1uF" Capacitor 2305,6968 r180 top
C19_U_SUPPLY_DECAP_NW1 "cap" Capacitor 1171,6476 r180 bottom (schematic designator C19)
C19_U_SUPPLY_DECAP_NW2 "cap" Capacitor 1295,6635 r180 bottom (schematic designator C19)
C19_U_SUPPLY_DECAP_NW3 "cap" Capacitor 2431,6673 r0 bottom (schematic designator C19)
C19_U_SUPPLY_DECAP_NW4 "cap" Capacitor 2262,6514 r0 bottom (schematic designator C19)
C19_U_SUPPLY_DECAP_NW5 "cap" Capacitor 2265,6249 r0 bottom (schematic designator C19)
C19_U_SUPPLY_DECAP_NW6 "cap" Capacitor 2012,5913 r270 bottom (schematic designator C19)
C19_U_SUPPLY_DECAP_NW7 "cap" Capacitor 1865,5910 r270 bottom (schematic designator C19)
C19_U_SUPPLY_DECAP_NW8 "cap" Capacitor 1722,5916 r270 bottom (schematic designator C19)
C19_U_SUPPLY_DECAP_NW9 "cap" Capacitor 1417,6238 r180 bottom (schematic designator C19)
C19_U_SUPPLY_DECAP_NW10 "cap" Capacitor 703,6264 r180 bottom (schematic designator C19)
C20_U_SUPPLY_DECAP_NW1 "cap" Capacitor 1344,6477 r0 bottom (schematic designator C20)
C20_U_SUPPLY_DECAP_NW2 "cap" Capacitor 1468,6636 r0 bottom (schematic designator C20)
C20_U_SUPPLY_DECAP_NW3 "cap" Capacitor 2258,6672 r180 bottom (schematic designator C20)
C20_U_SUPPLY_DECAP_NW4 "cap" Capacitor 2089,6513 r180 bottom (schematic designator C20)
C20_U_SUPPLY_DECAP_NW5 "cap" Capacitor 2092,6248 r180 bottom (schematic designator C20)
C20_U_SUPPLY_DECAP_NW6 "cap" Capacitor 2011,6086 r90 bottom (schematic designator C20)
C20_U_SUPPLY_DECAP_NW7 "cap" Capacitor 1864,6083 r90 bottom (schematic designator C20)
C20_U_SUPPLY_DECAP_NW8 "cap" Capacitor 1721,6089 r90 bottom (schematic designator C20)
C20_U_SUPPLY_DECAP_NW9 "cap" Capacitor 1590,6239 r0 bottom (schematic designator C20)
C20_U_SUPPLY_DECAP_NW10 "cap" Capacitor 876,6265 r0 bottom (schematic designator C20)
C21_U_SUPPLY_DECAP_NW1 "cap" Capacitor 1171,6476 r180 top (schematic designator C21)
C21_U_SUPPLY_DECAP_NW2 "cap" Capacitor 1295,6635 r180 top (schematic designator C21)
C21_U_SUPPLY_DECAP_NW3 "cap" Capacitor 2431,6673 r0 top (schematic designator C21)
C21_U_SUPPLY_DECAP_NW4 "cap" Capacitor 2262,6514 r0 top (schematic designator C21)
C21_U_SUPPLY_DECAP_NW5 "cap" Capacitor 2265,6249 r0 top (schematic designator C21)
C21_U_SUPPLY_DECAP_NW6 "cap" Capacitor 2012,5913 r270 top (schematic designator C21)
C21_U_SUPPLY_DECAP_NW7 "cap" Capacitor 1865,5910 r270 top (schematic designator C21)
C21_U_SUPPLY_DECAP_NW8 "cap" Capacitor 1722,5916 r270 top (schematic designator C21)
C21_U_SUPPLY_DECAP_NW9 "cap" Capacitor 1417,6238 r180 top (schematic designator C21)
C21_U_SUPPLY_DECAP_NW10 "cap" Capacitor 703,6264 r180 top (schematic designator C21)
JP1_U_LDO1 "JP2" JUMPER2 5297,5082 r270 top (schematic designator JP1)
JP1_U_LDO2 "JP2" JUMPER2 1616,5081 r270 top (schematic designator JP1)
JP1_U_LDO3 "JP2" JUMPER2 4672,6056 r270 top (schematic designator JP1)
JP1_U_LDO4 "JP2" JUMPER2 698,4149 r270 top (schematic designator JP1)
JP1_U_LDO5 "JP2" JUMPER2 5302,4144 r270 top (schematic designator JP1)
JP1_U_LDO6 "JP2" JUMPER2 3647,7186 r270 top (schematic designator JP1)
JP1_U_LDO7 "JP2" JUMPER2 4377,4151 r270 top (schematic designator JP1)
JP1_U_LDO8 "JP2" JUMPER2 3461,5082 r270 top (schematic designator JP1)
JP1_U_LDO9 "JP2" JUMPER2 4381,5082 r270 top (schematic designator JP1)
JP1_U_LDO10 "JP2" JUMPER2 693,5082 r270 top (schematic designator JP1)
JP1_U_LDO11 "JP2" JUMPER2 2541,5082 r270 top (schematic designator JP1)
JP1_U_LDO12 "JP2" JUMPER2 3649.5,6251.5 r270 top (schematic designator JP1)
JP1_U_LDO13 "JP2" JUMPER2 3460,4146 r270 top (schematic designator JP1)
JP2_U_LDO1 "JP2" JUMPER2 4969,4854 r180 top (schematic designator JP2)
JP2_U_LDO2 "JP2" JUMPER2 1288,4853 r180 top (schematic designator JP2)
JP2_U_LDO3 "JP2" JUMPER2 4344,5828 r180 top (schematic designator JP2)
JP2_U_LDO4 "JP2" JUMPER2 370,3921 r180 top (schematic designator JP2)
JP2_U_LDO5 "JP2" JUMPER2 4974,3916 r180 top (schematic designator JP2)
JP2_U_LDO6 "JP2" JUMPER2 3319,6958 r180 top (schematic designator JP2)
JP2_U_LDO7 "JP2" JUMPER2 4049,3923 r180 top (schematic designator JP2)
JP2_U_LDO8 "JP2" JUMPER2 3133,4854 r180 top (schematic designator JP2)
JP2_U_LDO9 "JP2" JUMPER2 4053,4854 r180 top (schematic designator JP2)
JP2_U_LDO10 "JP2" JUMPER2 365,4854 r180 top (schematic designator JP2)
JP2_U_LDO11 "JP2" JUMPER2 2213,4854 r180 top (schematic designator JP2)
JP2_U_LDO12 "JP2" JUMPER2 3321.5,6023.5 r180 top (schematic designator JP2)
JP2_U_LDO13 "JP2" JUMPER2 3132,3918 r180 top (schematic designator JP2)
JP3 "MC_JUMPER" JUMPER10 4738,6994 r0 top
JP4 "JP2" JUMPER2 711,6501 r0 top
JP5 "JP3" JUMPER3 1617,3779 r0 top
JP6 "JP3" JUMPER3 2545,3774 r0 top
JP7 "JP3" JUMPER3 5423,6243 r0 top
JP8 "JP3" JUMPER3 6335,6240 r0 top
JP9 "JP3" JUMPER3 5909,6251 r0 top
LDO1_U_LDO1 "LDO" LT3060 5494.5,4918.5 r270 top (schematic designator LDO1)
LDO1_U_LDO2 "LDO" LT3060 1813.5,4917.5 r270 top (schematic designator LDO1)
LDO1_U_LDO3 "LDO" LT3060 4869.5,5892.5 r270 top (schematic designator LDO1)
LDO1_U_LDO4 "LDO" LT3060 895.5,3985.5 r270 top (schematic designator LDO1)
LDO1_U_LDO5 "LDO" LT3060 5499.5,3980.5 r270 top (schematic designator LDO1)
LDO1_U_LDO6 "LDO" LT3060 3844.5,7022.5 r270 top (schematic designator LDO1)
LDO1_U_LDO7 "LDO" LT3060 4574.5,3987.5 r270 top (schematic designator LDO1)
LDO1_U_LDO8 "LDO" LT3060 3658.5,4918.5 r270 top (schematic designator LDO1)
LDO1_U_LDO9 "LDO" LT3060 4578.5,4918.5 r270 top (schematic designator LDO1)
LDO1_U_LDO10 "LDO" LT3060 890.5,4918.5 r270 top (schematic designator LDO1)
LDO1_U_LDO11 "LDO" LT3060 2738.5,4918.5 r270 top (schematic designator LDO1)
LDO1_U_LDO12 "LDO" LT3060 3847,6088 r270 top (schematic designator LDO1)
LDO1_U_LDO13 "LDO" LT3060 3657.5,3982.5 r270 top (schematic designator LDO1)
Pillar5 "Pillar" Pillar_hole 9844,560 r90 top
Pillar6 "Pillar" Pillar_hole 9403,560 r90 top
Pillar7 "Pillar" Pillar_hole 8963,560 r90 top
Pillar8 "Pillar" Pillar_hole 8522,560 r90 top
Pot1_U_LDO1 "200k ohm" Pot 5256.5,4905.5 r270 top (schematic designator Pot1)
Pot1_U_LDO2 "200k ohm" Pot 1575.5,4904.5 r270 top (schematic designator Pot1)
Pot1_U_LDO3 "200k ohm" Pot 4631.5,5879.5 r270 top (schematic designator Pot1)
Pot1_U_LDO4 "200k ohm" Pot 657.5,3972.5 r270 top (schematic designator Pot1)
Pot1_U_LDO5 "200k ohm" Pot 5261.5,3967.5 r270 top (schematic designator Pot1)
Pot1_U_LDO6 "200k ohm" Pot 3606.5,7009.5 r270 top (schematic designator Pot1)
Pot1_U_LDO7 "200k ohm" Pot 4336.5,3974.5 r270 top (schematic designator Pot1)
Pot1_U_LDO8 "200k ohm" Pot 3420.5,4905.5 r270 top (schematic designator Pot1)
Pot1_U_LDO9 "200k ohm" Pot 4340.5,4905.5 r270 top (schematic designator Pot1)
Pot1_U_LDO10 "200k ohm" Pot 652.5,4905.5 r270 top (schematic designator Pot1)
Pot1_U_LDO11 "200k ohm" Pot 2500.5,4905.5 r270 top (schematic designator Pot1)
Pot1_U_LDO12 "200k ohm" Pot 3609,6075 r270 top (schematic designator Pot1)
Pot1_U_LDO13 "200k ohm" Pot 3419.5,3969.5 r270 top (schematic designator Pot1)
Pot2 "1k pot" Pot 1944,3777 r270 top
Pot3 "1k pot" Pot 2220,3777 r270 top
Pot4 "10k pot" Pot 5650,6029 r90 top
Pot5 "10k pot" Pot 6545,6011 r90 top
Pot6 "10k pot" Pot 6099,6020 r90 top
R1_U_LDO1 "5 ohm" Resistor 5082,4899 r90 top (schematic designator R1)
R1_U_LDO2 "5 ohm" Resistor 1401,4898 r90 top (schematic designator R1)
R1_U_LDO3 "5 ohm" Resistor 4457,5873 r90 top (schematic designator R1)
R1_U_LDO4 "5 ohm" Resistor 483,3966 r90 top (schematic designator R1)
R1_U_LDO5 "5 ohm" Resistor 5087,3961 r90 top (schematic designator R1)
R1_U_LDO6 "5 ohm" Resistor 3432,7003 r90 top (schematic designator R1)
R1_U_LDO7 "5 ohm" Resistor 4162,3968 r90 top (schematic designator R1)
R1_U_LDO8 "5 ohm" Resistor 3246,4899 r90 top (schematic designator R1)
R1_U_LDO9 "5 ohm" Resistor 4166,4899 r90 top (schematic designator R1)
R1_U_LDO10 "5 ohm" Resistor 478,4899 r90 top (schematic designator R1)
R1_U_LDO11 "5 ohm" Resistor 2326,4899 r90 top (schematic designator R1)
R1_U_LDO12 "5 ohm" Resistor 3434.5,6068.5 r90 top (schematic designator R1)
R1_U_LDO13 "5 ohm" Resistor 3245,3963 r90 top (schematic designator R1)
R2_U_LDO1 "36k ohm" Resistor 5453,4395 r180 top (schematic designator R2)
R2_U_LDO2 "36k ohm" Resistor 1772,4394 r180 top (schematic designator R2)
R2_U_LDO3 "36k ohm" Resistor 4826,5379 r180 top (schematic designator R2)
R2_U_LDO4 "36k ohm" Resistor 854,3462 r180 top (schematic designator R2)
R2_U_LDO5 "36k ohm" Resistor 5458,3457 r180 top (schematic designator R2)
R2_U_LDO6 "36k ohm" Resistor 3803,6499 r180 top (schematic designator R2)
R2_U_LDO7 "36k ohm" Resistor 4533,3464 r180 top (schematic designator R2)
R2_U_LDO8 "36k ohm" Resistor 3617,4395 r180 top (schematic designator R2)
R2_U_LDO9 "36k ohm" Resistor 4537,4395 r180 top (schematic designator R2)
R2_U_LDO10 "36k ohm" Resistor 849,4395 r180 top (schematic designator R2)
R2_U_LDO11 "36k ohm" Resistor 2697,4395 r180 top (schematic designator R2)
R2_U_LDO12 "36k ohm" Resistor 3805.5,5564.5 r180 top (schematic designator R2)
R2_U_LDO13 "36k ohm" Resistor 3616,3459 r180 top (schematic designator R2)
R3 "10k" Resistor 5051,6997 r180 top
R4 "10k" Resistor 5048,6901 r180 top
R5 "10k" Resistor 4580,6794 r0 top
R6 "10k" Resistor 5051,6808 r180 top
R7 "10k" Resistor 4585,6687 r0 top
R8 "10k" Resistor 5049,6694 r180 top